# EAGLE board SparkX_EZ_Power_AAA-Panel (EAGLE 9.6.2), part 1 of 13
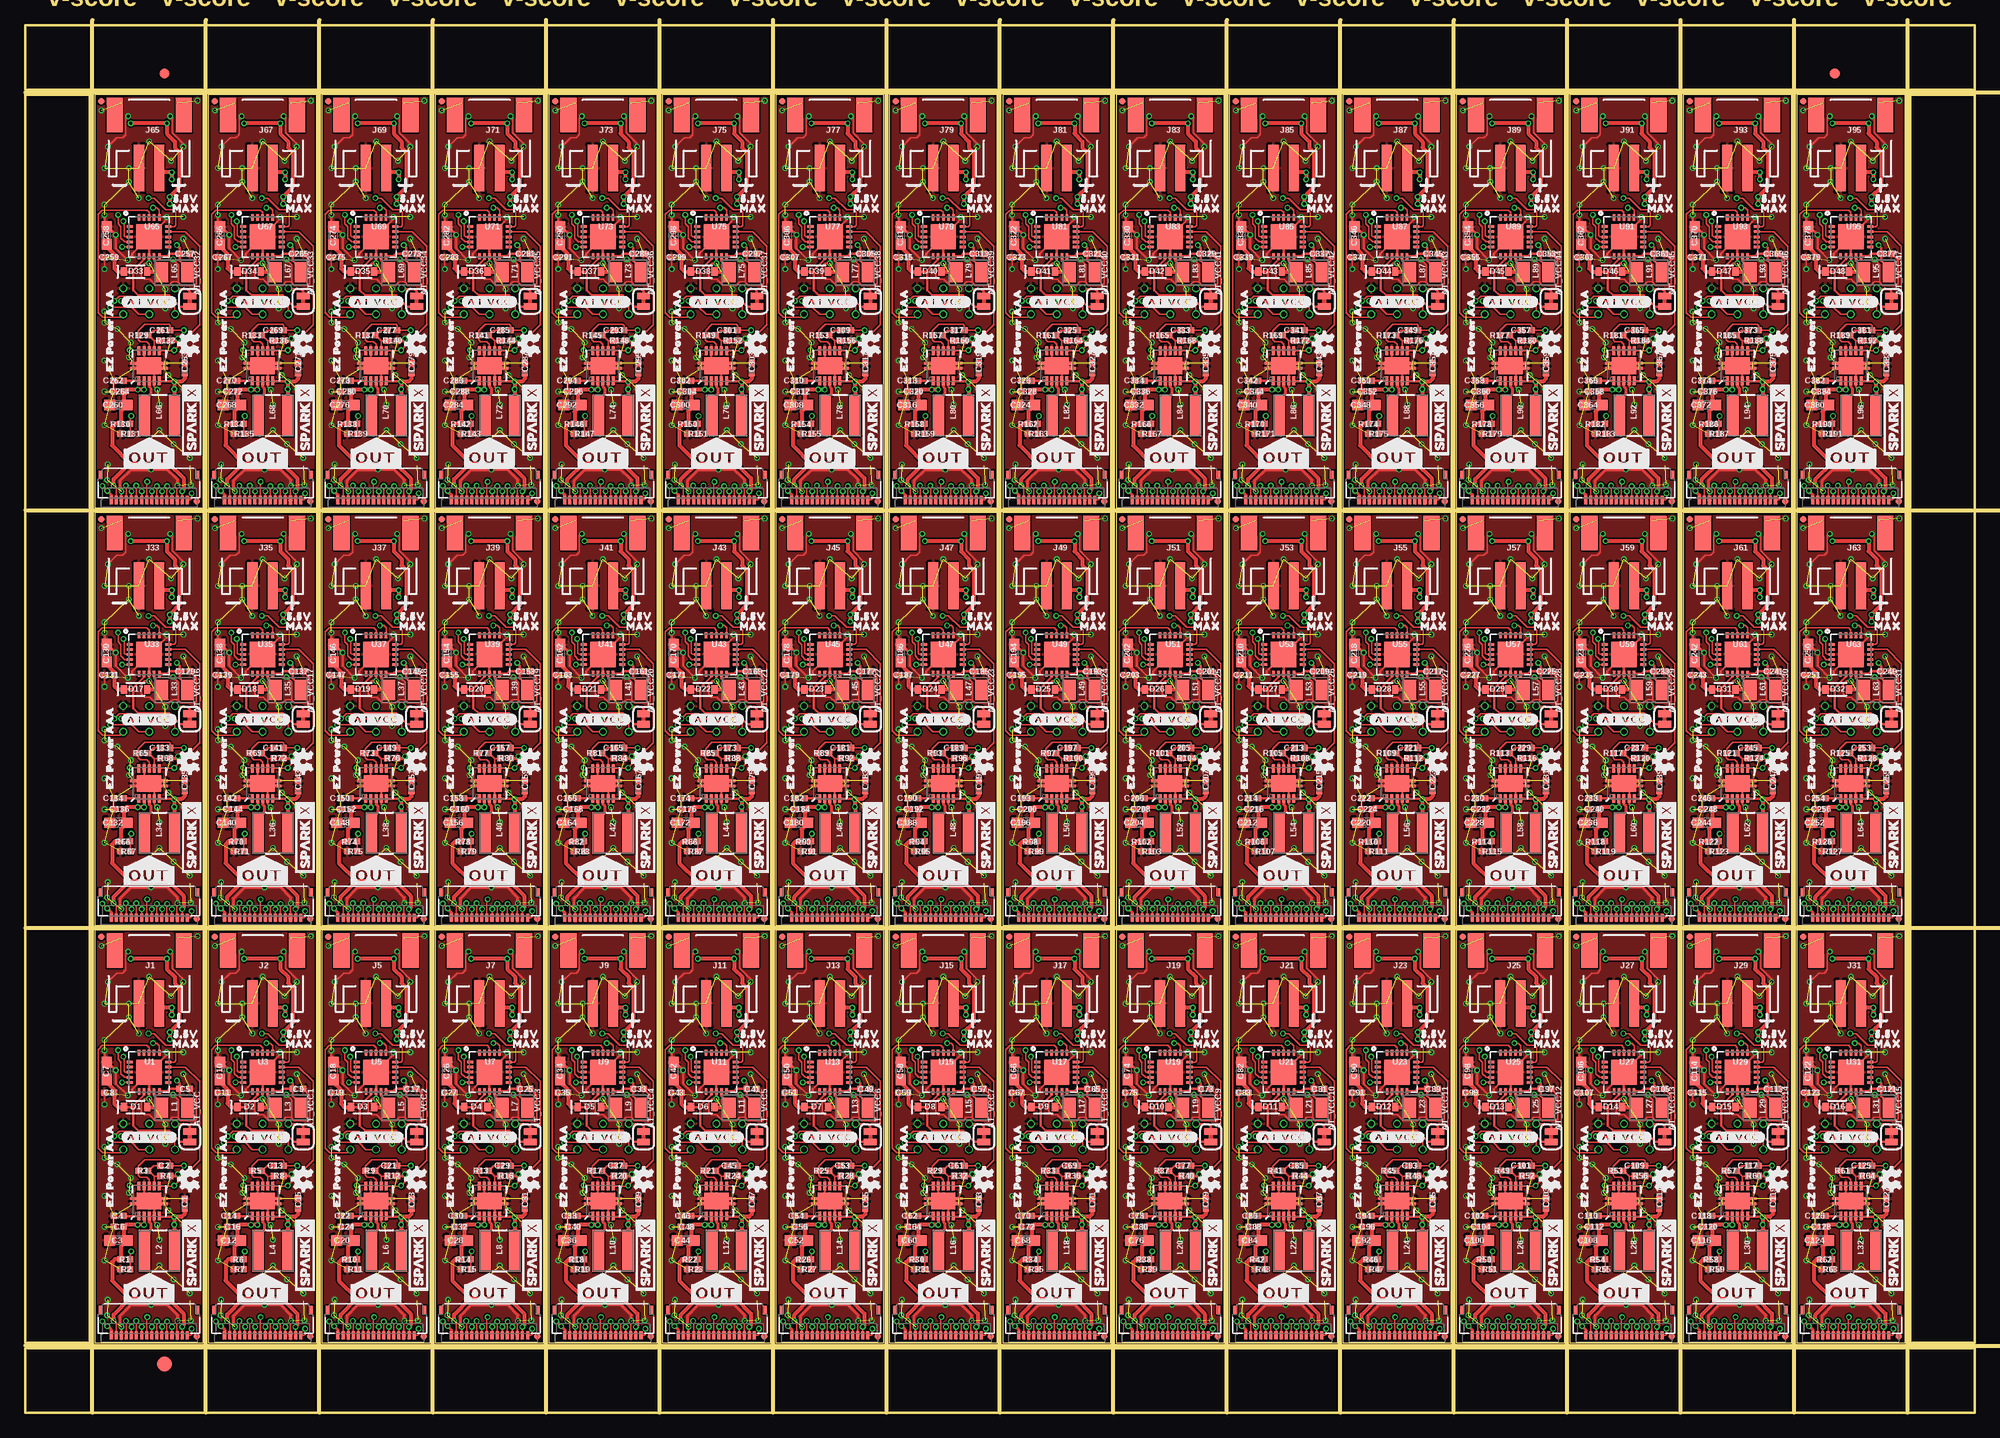
[diagram p0: board, top side]
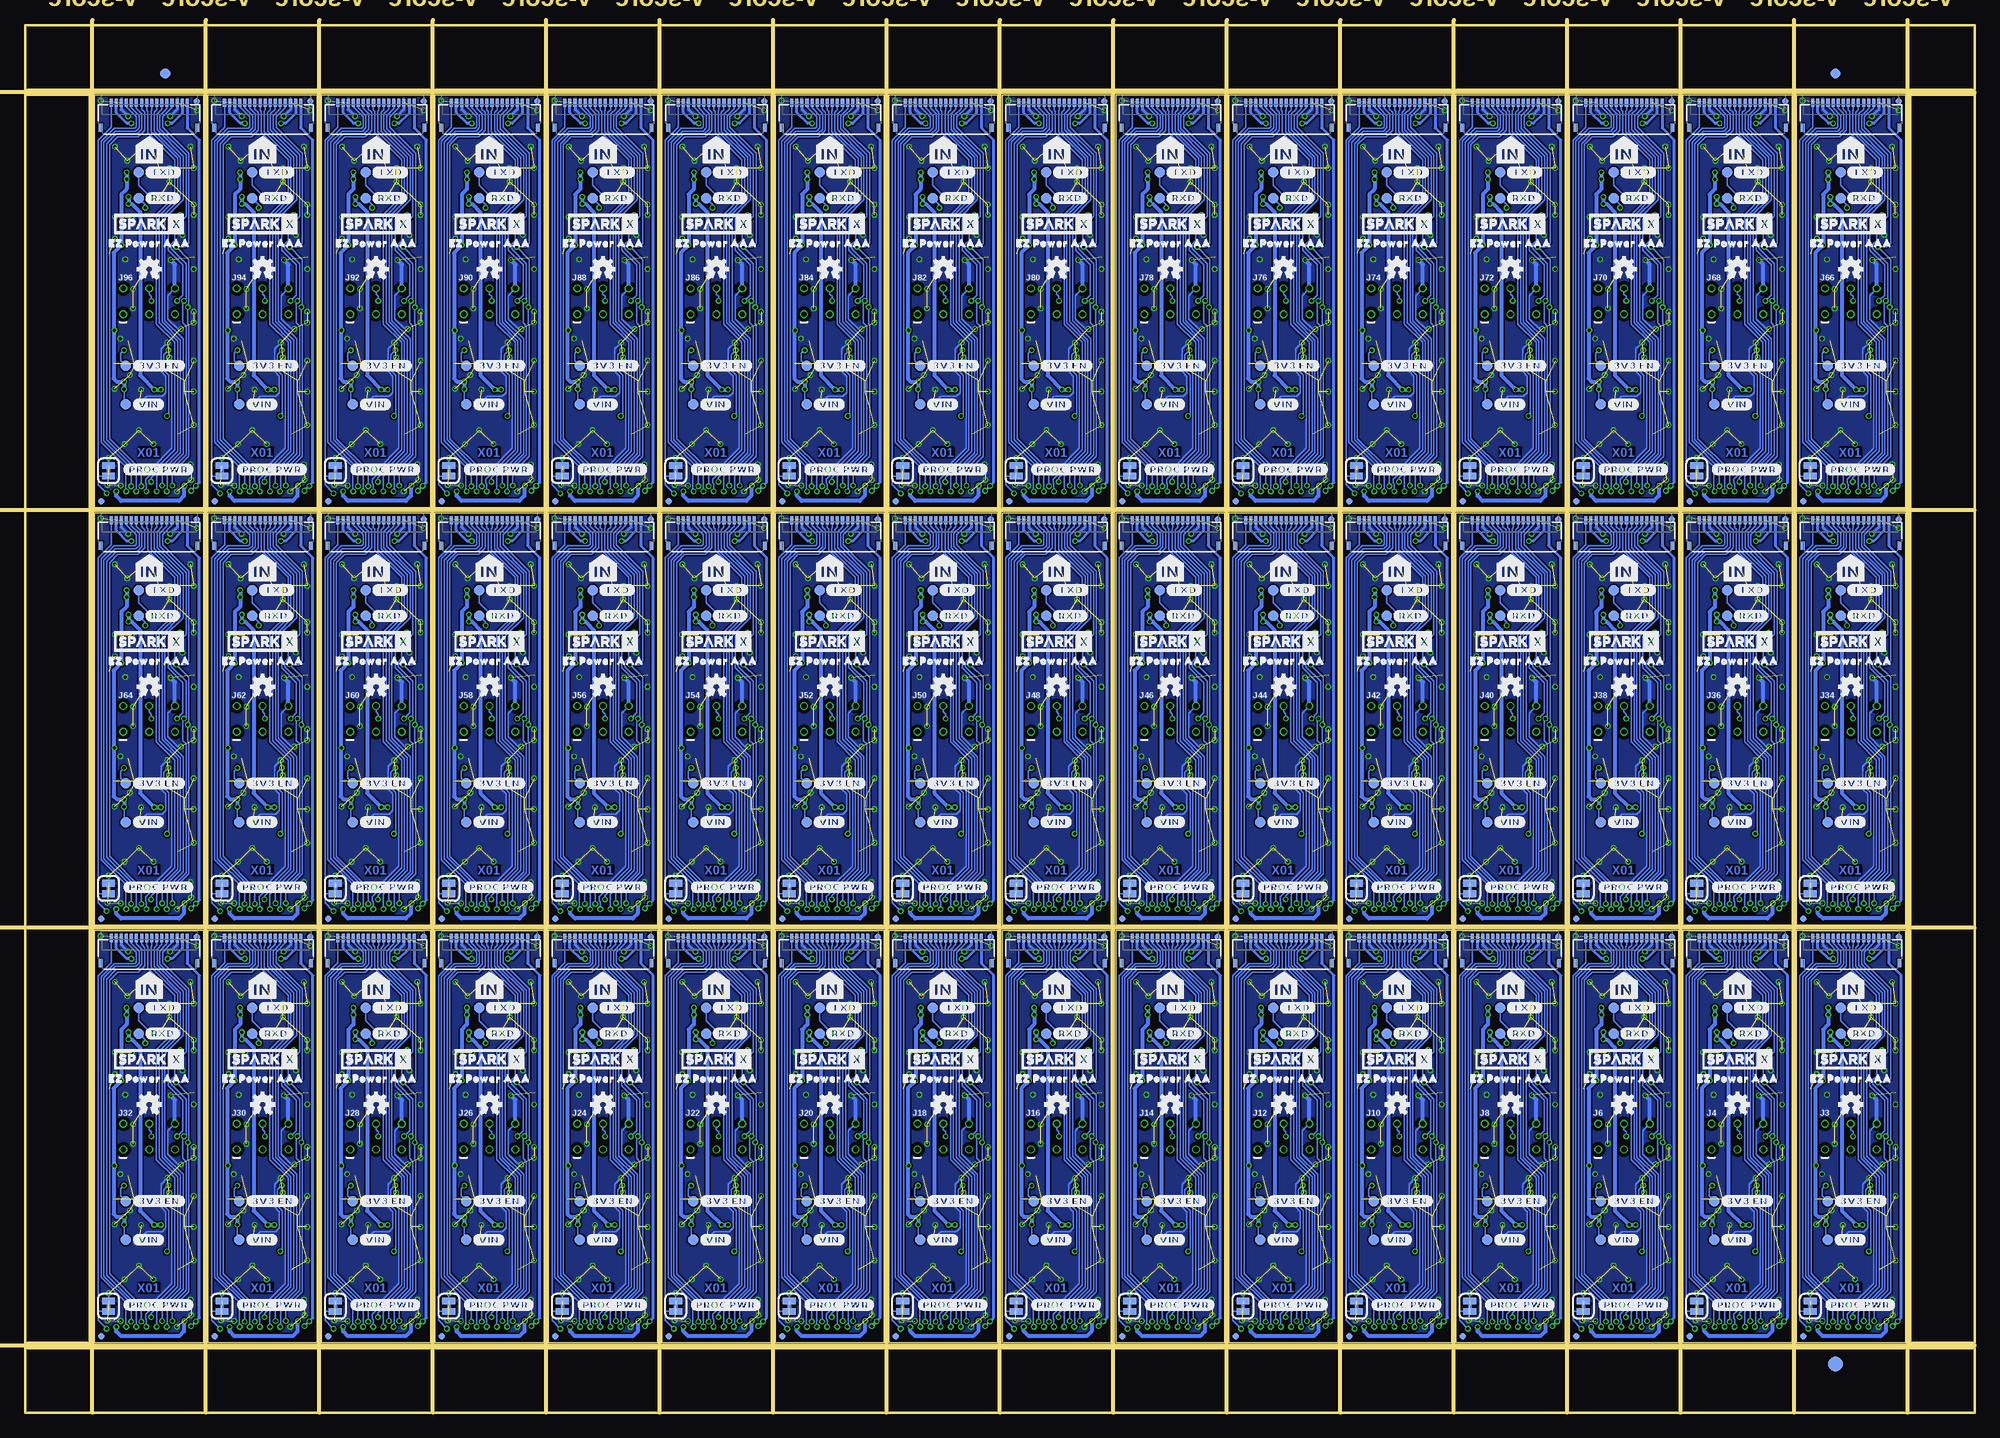
[diagram p1: board, bottom side, seen from below]

Size 192.02 x 136.65 mm. Coordinates in mm from the lower left corner, seen from the top.
Outline: 208 segments
Copper layers (1*16): Top 0.035mm / dielectric 1.5mm / Bottom 0.035mm
Design rules "SparkX_EZ_Power_AAA": minimum track width 5mil, minimum drill 0.3mm, track to track 5mil, track to pad 5mil, pad to pad 5mil, via to via 5mil, smd to smd 5mil, copper to edge 7mil, drill to drill 7mil, minimum pad ring 5mil, minimum via ring 5mil, stop-mask expansion 2.5mil, vias tented up to drill 25mil, thermal gap 10mil
bRestrict: area 9.1,27.9 to 10.2,29; area 11.7,27.9 to 12.7,29; area 14.2,27.9 to 15.2,29; area 14.2,25.4 to 15.2,26.4; area 11.7,25.4 to 12.7,26.4; area 9.1,25.4 to 10.2,26.4; area 20.3,27.9 to 21.3,29; area 22.9,27.9 to 23.9,29; area 25.4,27.9 to 26.4,29; area 25.4,25.4 to 26.4,26.4; area 22.9,25.4 to 23.9,26.4; area 20.3,25.4 to 21.3,26.4; 276 more areas
Milling: 21 lines

## Footprints (pad centres in the part's own frame; a part is rotated, then mirrored left to right if it is on the bottom)
PAD.03X.04 = smd 1.016 x 1.016: 1 0,0
SMT-JUMPER_2_NC_TRACE_SILK = smd 0.66 x 1.27: 1 -0.521,0; 2 0.521,0
0402-TIGHT = smd 0.6 x 0.6: 1 -0.5,0; 2 0.5,0
0603 = smd 1.1 x 1: 1 -0.85,0; 2 0.85,0
SOD-323 = smd 0.63 x 0.83: A 1.15,0; C -1.15,0
FIDUCIAL-1X2 = smd 1 x 1: 1 0,0
FIDUCIAL-1.5X3 = smd 1.5 x 1.5: 1 0,0
FIDUCIAL-MICRO = smd 0.635 x 0.635: 1 0,0
FPC_16_DOUBLESIDED_BACKFLIP = smd 0.3 x 0.8: 1 -3.75,1.35; 2 -3.25,1.35; 3 -2.75,1.35; 4 -2.25,1.35; 5 -1.75,1.35; 6 -1.25,1.35; 7 -0.75,1.35; 8 -0.25,1.35; 9 0.25,1.35; 10 0.75,1.35; 11 1.25,1.35; 12 1.75,1.35; 13 2.25,1.35; 14 2.75,1.35; 15 3.25,1.35; 16 3.75,1.35 | smd 0.4 x 0.8: MP1 -4.75,-1.15; MP2 4.75,-1.15
JST-2-SMD = smd 1 x 4.6: 1 -1,-3.7; 2 1,-3.7 | smd 1.6 x 3.4: NC1 -3.4,1.5; NC2 3.4,1.5
2X3_TEST_POINTS = drill 0.508: 1 -2.54,-1.27; 2 -2.54,1.27; 3 0,-1.27; 4 0,1.27; 5 2.54,-1.27; 6 2.54,1.27
INDUCTOR_LQH32 = smd 2 x 1.25: P$1 -0.07,1.205; P$2 -0.07,-1.295
INDUCTOR_4X4MM = smd 4.089 x 1.143: P$1 0,1.473; P$2 0,-1.473
QFN20_20M1 = smd 0.6 x 0.25: 1 -1.9,1; 2 -1.9,0.5; 3 -1.9,0; 4 -1.9,-0.5; 5 -1.9,-1; 11 1.9,-1; 12 1.9,-0.5; 13 1.9,0; 14 1.9,0.5; 15 1.9,1 | smd 0.25 x 0.6: 6 -1,-1.9; 7 -0.5,-1.9; 8 0,-1.9; 9 0.5,-1.9; 10 1,-1.9; 16 1,1.9; 17 0.5,1.9; 18 0,1.9; 19 -0.5,1.9; 20 -1,1.9 | smd 2.5 x 2.5: PAD 0,0
QFN-10_PAD = smd 0.297 x 0.85: 1 -1,-1.475; 2 -0.5,-1.475; 3 0,-1.475; 4 0.5,-1.475; 5 1,-1.475; 6 1,1.475; 7 0.5,1.475; 8 0,1.475; 9 -0.5,1.475; 10 -1,1.475 | smd 0.7 x 0.28: 11 -1.5,0.25; 12 -1.5,-0.25; 13 1.5,0.25; 14 1.5,-0.25 | smd 2.4 x 1.65: 15 0,0

## Placement (x,y rotation side)
3V3_EN  TEST-POINT3X4  [PAD.03X.04]  14.48,20.83 0 bottom
3V3_EN1  TEST-POINT3X4  [PAD.03X.04]  25.65,20.83 0 bottom
3V3_EN2  TEST-POINT3X4  [PAD.03X.04]  36.83,20.83 0 bottom
3V3_EN3  TEST-POINT3X4  [PAD.03X.04]  48.01,20.83 0 bottom
3V3_EN4  TEST-POINT3X4  [PAD.03X.04]  59.18,20.83 0 bottom
3V3_EN5  TEST-POINT3X4  [PAD.03X.04]  70.36,20.83 0 bottom
3V3_EN6  TEST-POINT3X4  [PAD.03X.04]  81.53,20.83 0 bottom
3V3_EN7  TEST-POINT3X4  [PAD.03X.04]  92.71,20.83 0 bottom
3V3_EN8  TEST-POINT3X4  [PAD.03X.04]  103.89,20.83 0 bottom
3V3_EN9  TEST-POINT3X4  [PAD.03X.04]  115.06,20.83 0 bottom
3V3_EN10  TEST-POINT3X4  [PAD.03X.04]  126.24,20.83 0 bottom
3V3_EN11  TEST-POINT3X4  [PAD.03X.04]  137.41,20.83 0 bottom
3V3_EN12  TEST-POINT3X4  [PAD.03X.04]  148.59,20.83 0 bottom
3V3_EN13  TEST-POINT3X4  [PAD.03X.04]  159.77,20.83 0 bottom
3V3_EN14  TEST-POINT3X4  [PAD.03X.04]  170.94,20.83 0 bottom
3V3_EN15  TEST-POINT3X4  [PAD.03X.04]  182.12,20.83 0 bottom
3V3_EN16  TEST-POINT3X4  [PAD.03X.04]  14.48,61.98 0 bottom
3V3_EN17  TEST-POINT3X4  [PAD.03X.04]  25.65,61.98 0 bottom
3V3_EN18  TEST-POINT3X4  [PAD.03X.04]  36.83,61.98 0 bottom
3V3_EN19  TEST-POINT3X4  [PAD.03X.04]  48.01,61.98 0 bottom
3V3_EN20  TEST-POINT3X4  [PAD.03X.04]  59.18,61.98 0 bottom
3V3_EN21  TEST-POINT3X4  [PAD.03X.04]  70.36,61.98 0 bottom
3V3_EN22  TEST-POINT3X4  [PAD.03X.04]  81.53,61.98 0 bottom
3V3_EN23  TEST-POINT3X4  [PAD.03X.04]  92.71,61.98 0 bottom
3V3_EN24  TEST-POINT3X4  [PAD.03X.04]  103.89,61.98 0 bottom
3V3_EN25  TEST-POINT3X4  [PAD.03X.04]  115.06,61.98 0 bottom
3V3_EN26  TEST-POINT3X4  [PAD.03X.04]  126.24,61.98 0 bottom
3V3_EN27  TEST-POINT3X4  [PAD.03X.04]  137.41,61.98 0 bottom
3V3_EN28  TEST-POINT3X4  [PAD.03X.04]  148.59,61.98 0 bottom
3V3_EN29  TEST-POINT3X4  [PAD.03X.04]  159.77,61.98 0 bottom
3V3_EN30  TEST-POINT3X4  [PAD.03X.04]  170.94,61.98 0 bottom
3V3_EN31  TEST-POINT3X4  [PAD.03X.04]  182.12,61.98 0 bottom
3V3_EN32  TEST-POINT3X4  [PAD.03X.04]  14.48,103.12 0 bottom
3V3_EN33  TEST-POINT3X4  [PAD.03X.04]  25.65,103.12 0 bottom
3V3_EN34  TEST-POINT3X4  [PAD.03X.04]  36.83,103.12 0 bottom
3V3_EN35  TEST-POINT3X4  [PAD.03X.04]  48.01,103.12 0 bottom
3V3_EN36  TEST-POINT3X4  [PAD.03X.04]  59.18,103.12 0 bottom
3V3_EN37  TEST-POINT3X4  [PAD.03X.04]  70.36,103.12 0 bottom
3V3_EN38  TEST-POINT3X4  [PAD.03X.04]  81.53,103.12 0 bottom
3V3_EN39  TEST-POINT3X4  [PAD.03X.04]  92.71,103.12 0 bottom
3V3_EN40  TEST-POINT3X4  [PAD.03X.04]  103.89,103.12 0 bottom
3V3_EN41  TEST-POINT3X4  [PAD.03X.04]  115.06,103.12 0 bottom
3V3_EN42  TEST-POINT3X4  [PAD.03X.04]  126.24,103.12 0 bottom
3V3_EN43  TEST-POINT3X4  [PAD.03X.04]  137.41,103.12 0 bottom
3V3_EN44  TEST-POINT3X4  [PAD.03X.04]  148.59,103.12 0 bottom
3V3_EN45  TEST-POINT3X4  [PAD.03X.04]  159.77,103.12 0 bottom
3V3_EN46  TEST-POINT3X4  [PAD.03X.04]  170.94,103.12 0 bottom
3V3_EN47  TEST-POINT3X4  [PAD.03X.04]  182.12,103.12 0 bottom
AT_VCC  JUMPER-SMT_2_NC_TRACE_SILK  [SMT-JUMPER_2_NC_TRACE_SILK]  16.19,27.18 270 top
AT_VCC1  JUMPER-SMT_2_NC_TRACE_SILK  [SMT-JUMPER_2_NC_TRACE_SILK]  27.37,27.18 270 top
AT_VCC2  JUMPER-SMT_2_NC_TRACE_SILK  [SMT-JUMPER_2_NC_TRACE_SILK]  38.54,27.18 270 top
AT_VCC3  JUMPER-SMT_2_NC_TRACE_SILK  [SMT-JUMPER_2_NC_TRACE_SILK]  49.72,27.18 270 top
AT_VCC4  JUMPER-SMT_2_NC_TRACE_SILK  [SMT-JUMPER_2_NC_TRACE_SILK]  60.9,27.18 270 top
AT_VCC5  JUMPER-SMT_2_NC_TRACE_SILK  [SMT-JUMPER_2_NC_TRACE_SILK]  72.07,27.18 270 top
AT_VCC6  JUMPER-SMT_2_NC_TRACE_SILK  [SMT-JUMPER_2_NC_TRACE_SILK]  83.25,27.18 270 top
AT_VCC7  JUMPER-SMT_2_NC_TRACE_SILK  [SMT-JUMPER_2_NC_TRACE_SILK]  94.42,27.18 270 top
AT_VCC8  JUMPER-SMT_2_NC_TRACE_SILK  [SMT-JUMPER_2_NC_TRACE_SILK]  105.6,27.18 270 top
AT_VCC9  JUMPER-SMT_2_NC_TRACE_SILK  [SMT-JUMPER_2_NC_TRACE_SILK]  116.78,27.18 270 top
AT_VCC10  JUMPER-SMT_2_NC_TRACE_SILK  [SMT-JUMPER_2_NC_TRACE_SILK]  127.95,27.18 270 top
AT_VCC11  JUMPER-SMT_2_NC_TRACE_SILK  [SMT-JUMPER_2_NC_TRACE_SILK]  139.13,27.18 270 top
AT_VCC12  JUMPER-SMT_2_NC_TRACE_SILK  [SMT-JUMPER_2_NC_TRACE_SILK]  150.3,27.18 270 top
AT_VCC13  JUMPER-SMT_2_NC_TRACE_SILK  [SMT-JUMPER_2_NC_TRACE_SILK]  161.48,27.18 270 top
AT_VCC14  JUMPER-SMT_2_NC_TRACE_SILK  [SMT-JUMPER_2_NC_TRACE_SILK]  172.66,27.18 270 top
AT_VCC15  JUMPER-SMT_2_NC_TRACE_SILK  [SMT-JUMPER_2_NC_TRACE_SILK]  183.83,27.18 270 top
AT_VCC16  JUMPER-SMT_2_NC_TRACE_SILK  [SMT-JUMPER_2_NC_TRACE_SILK]  16.19,68.33 270 top
AT_VCC17  JUMPER-SMT_2_NC_TRACE_SILK  [SMT-JUMPER_2_NC_TRACE_SILK]  27.37,68.33 270 top
AT_VCC18  JUMPER-SMT_2_NC_TRACE_SILK  [SMT-JUMPER_2_NC_TRACE_SILK]  38.54,68.33 270 top
AT_VCC19  JUMPER-SMT_2_NC_TRACE_SILK  [SMT-JUMPER_2_NC_TRACE_SILK]  49.72,68.33 270 top
AT_VCC20  JUMPER-SMT_2_NC_TRACE_SILK  [SMT-JUMPER_2_NC_TRACE_SILK]  60.9,68.33 270 top
AT_VCC21  JUMPER-SMT_2_NC_TRACE_SILK  [SMT-JUMPER_2_NC_TRACE_SILK]  72.07,68.33 270 top
AT_VCC22  JUMPER-SMT_2_NC_TRACE_SILK  [SMT-JUMPER_2_NC_TRACE_SILK]  83.25,68.33 270 top
AT_VCC23  JUMPER-SMT_2_NC_TRACE_SILK  [SMT-JUMPER_2_NC_TRACE_SILK]  94.42,68.33 270 top
AT_VCC24  JUMPER-SMT_2_NC_TRACE_SILK  [SMT-JUMPER_2_NC_TRACE_SILK]  105.6,68.33 270 top
AT_VCC25  JUMPER-SMT_2_NC_TRACE_SILK  [SMT-JUMPER_2_NC_TRACE_SILK]  116.78,68.33 270 top
AT_VCC26  JUMPER-SMT_2_NC_TRACE_SILK  [SMT-JUMPER_2_NC_TRACE_SILK]  127.95,68.33 270 top
AT_VCC27  JUMPER-SMT_2_NC_TRACE_SILK  [SMT-JUMPER_2_NC_TRACE_SILK]  139.13,68.33 270 top
AT_VCC28  JUMPER-SMT_2_NC_TRACE_SILK  [SMT-JUMPER_2_NC_TRACE_SILK]  150.3,68.33 270 top
AT_VCC29  JUMPER-SMT_2_NC_TRACE_SILK  [SMT-JUMPER_2_NC_TRACE_SILK]  161.48,68.33 270 top
AT_VCC30  JUMPER-SMT_2_NC_TRACE_SILK  [SMT-JUMPER_2_NC_TRACE_SILK]  172.66,68.33 270 top
AT_VCC31  JUMPER-SMT_2_NC_TRACE_SILK  [SMT-JUMPER_2_NC_TRACE_SILK]  183.83,68.33 270 top
AT_VCC32  JUMPER-SMT_2_NC_TRACE_SILK  [SMT-JUMPER_2_NC_TRACE_SILK]  16.19,109.47 270 top
AT_VCC33  JUMPER-SMT_2_NC_TRACE_SILK  [SMT-JUMPER_2_NC_TRACE_SILK]  27.37,109.47 270 top
AT_VCC34  JUMPER-SMT_2_NC_TRACE_SILK  [SMT-JUMPER_2_NC_TRACE_SILK]  38.54,109.47 270 top
AT_VCC35  JUMPER-SMT_2_NC_TRACE_SILK  [SMT-JUMPER_2_NC_TRACE_SILK]  49.72,109.47 270 top
AT_VCC36  JUMPER-SMT_2_NC_TRACE_SILK  [SMT-JUMPER_2_NC_TRACE_SILK]  60.9,109.47 270 top
AT_VCC37  JUMPER-SMT_2_NC_TRACE_SILK  [SMT-JUMPER_2_NC_TRACE_SILK]  72.07,109.47 270 top
AT_VCC38  JUMPER-SMT_2_NC_TRACE_SILK  [SMT-JUMPER_2_NC_TRACE_SILK]  83.25,109.47 270 top
AT_VCC39  JUMPER-SMT_2_NC_TRACE_SILK  [SMT-JUMPER_2_NC_TRACE_SILK]  94.42,109.47 270 top
AT_VCC40  JUMPER-SMT_2_NC_TRACE_SILK  [SMT-JUMPER_2_NC_TRACE_SILK]  105.6,109.47 270 top
AT_VCC41  JUMPER-SMT_2_NC_TRACE_SILK  [SMT-JUMPER_2_NC_TRACE_SILK]  116.78,109.47 270 top
AT_VCC42  JUMPER-SMT_2_NC_TRACE_SILK  [SMT-JUMPER_2_NC_TRACE_SILK]  127.95,109.47 270 top
AT_VCC43  JUMPER-SMT_2_NC_TRACE_SILK  [SMT-JUMPER_2_NC_TRACE_SILK]  139.13,109.47 270 top
AT_VCC44  JUMPER-SMT_2_NC_TRACE_SILK  [SMT-JUMPER_2_NC_TRACE_SILK]  150.3,109.47 270 top
AT_VCC45  JUMPER-SMT_2_NC_TRACE_SILK  [SMT-JUMPER_2_NC_TRACE_SILK]  161.48,109.47 270 top
AT_VCC46  JUMPER-SMT_2_NC_TRACE_SILK  [SMT-JUMPER_2_NC_TRACE_SILK]  172.66,109.47 270 top
AT_VCC47  JUMPER-SMT_2_NC_TRACE_SILK  [SMT-JUMPER_2_NC_TRACE_SILK]  183.83,109.47 270 top
C1  10uF  [0402-TIGHT]  15.68,20.57 90 top
C2  0.1uF  [0402-TIGHT]  13.78,24.32 180 top
C3  22uF  [0603]  9.18,16.95 180 top
C4  0.1uF  [0402-TIGHT]  9.21,19.37 180 top
C5  4.7uF  [0402-TIGHT]  15.68,31.88 0 top
C6  0.1uF  [0402-TIGHT]  9.21,18.29 180 top
C7  22uF  [0603]  8,33.66 90 top
C8  0.1uF  [0402-TIGHT]  8.25,31.5 180 top
C9  4.7uF  [0402-TIGHT]  26.86,31.88 0 top
C10  22uF  [0603]  19.18,33.66 90 top
C11  0.1uF  [0402-TIGHT]  19.43,31.5 180 top
C12  22uF  [0603]  20.35,16.95 180 top
C13  0.1uF  [0402-TIGHT]  24.96,24.32 180 top
C14  0.1uF  [0402-TIGHT]  20.38,19.37 180 top
C15  10uF  [0402-TIGHT]  26.86,20.57 90 top
C16  0.1uF  [0402-TIGHT]  20.38,18.29 180 top
C17  4.7uF  [0402-TIGHT]  38.04,31.88 0 top
C18  22uF  [0603]  30.35,33.66 90 top
C19  0.1uF  [0402-TIGHT]  30.61,31.5 180 top
C20  22uF  [0603]  31.53,16.95 180 top
C21  0.1uF  [0402-TIGHT]  36.13,24.32 180 top
C22  0.1uF  [0402-TIGHT]  31.56,19.37 180 top
C23  10uF  [0402-TIGHT]  38.04,20.57 90 top
C24  0.1uF  [0402-TIGHT]  31.56,18.29 180 top
C25  4.7uF  [0402-TIGHT]  49.21,31.88 0 top
C26  22uF  [0603]  41.53,33.66 90 top
C27  0.1uF  [0402-TIGHT]  41.78,31.5 180 top
C28  22uF  [0603]  42.7,16.95 180 top
C29  0.1uF  [0402-TIGHT]  47.31,24.32 180 top
C30  0.1uF  [0402-TIGHT]  42.74,19.37 180 top
C31  10uF  [0402-TIGHT]  49.21,20.57 90 top
C32  0.1uF  [0402-TIGHT]  42.74,18.29 180 top
C33  4.7uF  [0402-TIGHT]  60.39,31.88 0 top
C34  22uF  [0603]  52.7,33.66 90 top
C35  0.1uF  [0402-TIGHT]  52.96,31.5 180 top
C36  22uF  [0603]  53.88,16.95 180 top
C37  0.1uF  [0402-TIGHT]  58.48,24.32 180 top
C38  0.1uF  [0402-TIGHT]  53.91,19.37 180 top
C39  10uF  [0402-TIGHT]  60.39,20.57 90 top
C40  0.1uF  [0402-TIGHT]  53.91,18.29 180 top
C41  4.7uF  [0402-TIGHT]  71.56,31.88 0 top
C42  22uF  [0603]  63.88,33.66 90 top
C43  0.1uF  [0402-TIGHT]  64.14,31.5 180 top
C44  22uF  [0603]  65.06,16.95 180 top
C45  0.1uF  [0402-TIGHT]  69.66,24.32 180 top
C46  0.1uF  [0402-TIGHT]  65.09,19.37 180 top
C47  10uF  [0402-TIGHT]  71.56,20.57 90 top
C48  0.1uF  [0402-TIGHT]  65.09,18.29 180 top
C49  4.7uF  [0402-TIGHT]  82.74,31.88 0 top
C50  22uF  [0603]  75.06,33.66 90 top
C51  0.1uF  [0402-TIGHT]  75.31,31.5 180 top
C52  22uF  [0603]  76.23,16.95 180 top
C53  0.1uF  [0402-TIGHT]  80.84,24.32 180 top
C54  0.1uF  [0402-TIGHT]  76.26,19.37 180 top
C55  10uF  [0402-TIGHT]  82.74,20.57 90 top
C56  0.1uF  [0402-TIGHT]  76.26,18.29 180 top
C57  4.7uF  [0402-TIGHT]  93.92,31.88 0 top
C58  22uF  [0603]  86.23,33.66 90 top
C59  0.1uF  [0402-TIGHT]  86.49,31.5 180 top
C60  22uF  [0603]  87.41,16.95 180 top
C61  0.1uF  [0402-TIGHT]  92.01,24.32 180 top
C62  0.1uF  [0402-TIGHT]  87.44,19.37 180 top
C63  10uF  [0402-TIGHT]  93.92,20.57 90 top
C64  0.1uF  [0402-TIGHT]  87.44,18.29 180 top
C65  4.7uF  [0402-TIGHT]  105.09,31.88 0 top
C66  22uF  [0603]  97.41,33.66 90 top
C67  0.1uF  [0402-TIGHT]  97.66,31.5 180 top
C68  22uF  [0603]  98.58,16.95 180 top
C69  0.1uF  [0402-TIGHT]  103.19,24.32 180 top
C70  0.1uF  [0402-TIGHT]  98.62,19.37 180 top
C71  10uF  [0402-TIGHT]  105.09,20.57 90 top
C72  0.1uF  [0402-TIGHT]  98.62,18.29 180 top
C73  4.7uF  [0402-TIGHT]  116.27,31.88 0 top
C74  22uF  [0603]  108.59,33.66 90 top
C75  0.1uF  [0402-TIGHT]  108.84,31.5 180 top
C76  22uF  [0603]  109.76,16.95 180 top
C77  0.1uF  [0402-TIGHT]  114.36,24.32 180 top
C78  0.1uF  [0402-TIGHT]  109.79,19.37 180 top
C79  10uF  [0402-TIGHT]  116.27,20.57 90 top
C80  0.1uF  [0402-TIGHT]  109.79,18.29 180 top
C81  4.7uF  [0402-TIGHT]  127.44,31.88 0 top
C82  22uF  [0603]  119.76,33.66 90 top
C83  0.1uF  [0402-TIGHT]  120.02,31.5 180 top
C84  22uF  [0603]  120.94,16.95 180 top
C85  0.1uF  [0402-TIGHT]  125.54,24.32 180 top
C86  0.1uF  [0402-TIGHT]  120.97,19.37 180 top
C87  10uF  [0402-TIGHT]  127.44,20.57 90 top
C88  0.1uF  [0402-TIGHT]  120.97,18.29 180 top
C89  4.7uF  [0402-TIGHT]  138.62,31.88 0 top
C90  22uF  [0603]  130.94,33.66 90 top
C91  0.1uF  [0402-TIGHT]  131.19,31.5 180 top
C92  22uF  [0603]  132.11,16.95 180 top
C93  0.1uF  [0402-TIGHT]  136.72,24.32 180 top
C94  0.1uF  [0402-TIGHT]  132.14,19.37 180 top
C95  10uF  [0402-TIGHT]  138.62,20.57 90 top
C96  0.1uF  [0402-TIGHT]  132.14,18.29 180 top
C97  4.7uF  [0402-TIGHT]  149.8,31.88 0 top
C98  22uF  [0603]  142.11,33.66 90 top
C99  0.1uF  [0402-TIGHT]  142.37,31.5 180 top
C100  22uF  [0603]  143.29,16.95 180 top
C101  0.1uF  [0402-TIGHT]  147.89,24.32 180 top
C102  0.1uF  [0402-TIGHT]  143.32,19.37 180 top
C103  10uF  [0402-TIGHT]  149.8,20.57 90 top
C104  0.1uF  [0402-TIGHT]  143.32,18.29 180 top
C105  4.7uF  [0402-TIGHT]  160.97,31.88 0 top
C106  22uF  [0603]  153.29,33.66 90 top
C107  0.1uF  [0402-TIGHT]  153.54,31.5 180 top
C108  22uF  [0603]  154.46,16.95 180 top
C109  0.1uF  [0402-TIGHT]  159.07,24.32 180 top
C110  0.1uF  [0402-TIGHT]  154.5,19.37 180 top
C111  10uF  [0402-TIGHT]  160.97,20.57 90 top
C112  0.1uF  [0402-TIGHT]  154.5,18.29 180 top
C113  4.7uF  [0402-TIGHT]  172.15,31.88 0 top
C114  22uF  [0603]  164.47,33.66 90 top
C115  0.1uF  [0402-TIGHT]  164.72,31.5 180 top
C116  22uF  [0603]  165.64,16.95 180 top
C117  0.1uF  [0402-TIGHT]  170.24,24.32 180 top
C118  0.1uF  [0402-TIGHT]  165.67,19.37 180 top
C119  10uF  [0402-TIGHT]  172.15,20.57 90 top
C120  0.1uF  [0402-TIGHT]  165.67,18.29 180 top
C121  4.7uF  [0402-TIGHT]  183.32,31.88 0 top
C122  22uF  [0603]  175.64,33.66 90 top
C123  0.1uF  [0402-TIGHT]  175.9,31.5 180 top
C124  22uF  [0603]  176.82,16.95 180 top
C125  0.1uF  [0402-TIGHT]  181.42,24.32 180 top
C126  0.1uF  [0402-TIGHT]  176.85,19.37 180 top
C127  10uF  [0402-TIGHT]  183.32,20.57 90 top
C128  0.1uF  [0402-TIGHT]  176.85,18.29 180 top
C129  4.7uF  [0402-TIGHT]  15.68,73.03 0 top
C130  22uF  [0603]  8,74.8 90 top
C131  0.1uF  [0402-TIGHT]  8.25,72.64 180 top
C132  22uF  [0603]  9.18,58.1 180 top
C133  0.1uF  [0402-TIGHT]  13.78,65.47 180 top
C134  0.1uF  [0402-TIGHT]  9.21,60.52 180 top
C135  10uF  [0402-TIGHT]  15.68,61.72 90 top
C136  0.1uF  [0402-TIGHT]  9.21,59.44 180 top
C137  4.7uF  [0402-TIGHT]  26.86,73.03 0 top
C138  22uF  [0603]  19.18,74.8 90 top
C139  0.1uF  [0402-TIGHT]  19.43,72.64 180 top
C140  22uF  [0603]  20.35,58.1 180 top
C141  0.1uF  [0402-TIGHT]  24.96,65.47 180 top
C142  0.1uF  [0402-TIGHT]  20.38,60.52 180 top
C143  10uF  [0402-TIGHT]  26.86,61.72 90 top
C144  0.1uF  [0402-TIGHT]  20.38,59.44 180 top
C145  4.7uF  [0402-TIGHT]  38.04,73.03 0 top
C146  22uF  [0603]  30.35,74.8 90 top
C147  0.1uF  [0402-TIGHT]  30.61,72.64 180 top
C148  22uF  [0603]  31.53,58.1 180 top
C149  0.1uF  [0402-TIGHT]  36.13,65.47 180 top
C150  0.1uF  [0402-TIGHT]  31.56,60.52 180 top
C151  10uF  [0402-TIGHT]  38.04,61.72 90 top
C152  0.1uF  [0402-TIGHT]  31.56,59.44 180 top
C153  4.7uF  [0402-TIGHT]  49.21,73.03 0 top
C154  22uF  [0603]  41.53,74.8 90 top
C155  0.1uF  [0402-TIGHT]  41.78,72.64 180 top
C156  22uF  [0603]  42.7,58.1 180 top
C157  0.1uF  [0402-TIGHT]  47.31,65.47 180 top
C158  0.1uF  [0402-TIGHT]  42.74,60.52 180 top
C159  10uF  [0402-TIGHT]  49.21,61.72 90 top
C160  0.1uF  [0402-TIGHT]  42.74,59.44 180 top
C161  4.7uF  [0402-TIGHT]  60.39,73.03 0 top
C162  22uF  [0603]  52.7,74.8 90 top
C163  0.1uF  [0402-TIGHT]  52.96,72.64 180 top
C164  22uF  [0603]  53.88,58.1 180 top
C165  0.1uF  [0402-TIGHT]  58.48,65.47 180 top
C166  0.1uF  [0402-TIGHT]  53.91,60.52 180 top
C167  10uF  [0402-TIGHT]  60.39,61.72 90 top
C168  0.1uF  [0402-TIGHT]  53.91,59.44 180 top
C169  4.7uF  [0402-TIGHT]  71.56,73.03 0 top
C170  22uF  [0603]  63.88,74.8 90 top
C171  0.1uF  [0402-TIGHT]  64.14,72.64 180 top
C172  22uF  [0603]  65.06,58.1 180 top
C173  0.1uF  [0402-TIGHT]  69.66,65.47 180 top
C174  0.1uF  [0402-TIGHT]  65.09,60.52 180 top
C175  10uF  [0402-TIGHT]  71.56,61.72 90 top
C176  0.1uF  [0402-TIGHT]  65.09,59.44 180 top
C177  4.7uF  [0402-TIGHT]  82.74,73.03 0 top
C178  22uF  [0603]  75.06,74.8 90 top
C179  0.1uF  [0402-TIGHT]  75.31,72.64 180 top
C180  22uF  [0603]  76.23,58.1 180 top
C181  0.1uF  [0402-TIGHT]  80.84,65.47 180 top
C182  0.1uF  [0402-TIGHT]  76.26,60.52 180 top
C183  10uF  [0402-TIGHT]  82.74,61.72 90 top
C184  0.1uF  [0402-TIGHT]  76.26,59.44 180 top
C185  4.7uF  [0402-TIGHT]  93.92,73.03 0 top
C186  22uF  [0603]  86.23,74.8 90 top
C187  0.1uF  [0402-TIGHT]  86.49,72.64 180 top
C188  22uF  [0603]  87.41,58.1 180 top
C189  0.1uF  [0402-TIGHT]  92.01,65.47 180 top
C190  0.1uF  [0402-TIGHT]  87.44,60.52 180 top
C191  10uF  [0402-TIGHT]  93.92,61.72 90 top
C192  0.1uF  [0402-TIGHT]  87.44,59.44 180 top
C193  4.7uF  [0402-TIGHT]  105.09,73.03 0 top
C194  22uF  [0603]  97.41,74.8 90 top
C195  0.1uF  [0402-TIGHT]  97.66,72.64 180 top
C196  22uF  [0603]  98.58,58.1 180 top
C197  0.1uF  [0402-TIGHT]  103.19,65.47 180 top
C198  0.1uF  [0402-TIGHT]  98.62,60.52 180 top
C199  10uF  [0402-TIGHT]  105.09,61.72 90 top
C200  0.1uF  [0402-TIGHT]  98.62,59.44 180 top
C201  4.7uF  [0402-TIGHT]  116.27,73.03 0 top
C202  22uF  [0603]  108.59,74.8 90 top
C203  0.1uF  [0402-TIGHT]  108.84,72.64 180 top
C204  22uF  [0603]  109.76,58.1 180 top
C205  0.1uF  [0402-TIGHT]  114.36,65.47 180 top
C206  0.1uF  [0402-TIGHT]  109.79,60.52 180 top
C207  10uF  [0402-TIGHT]  116.27,61.72 90 top
C208  0.1uF  [0402-TIGHT]  109.79,59.44 180 top
C209  4.7uF  [0402-TIGHT]  127.44,73.03 0 top
C210  22uF  [0603]  119.76,74.8 90 top
C211  0.1uF  [0402-TIGHT]  120.02,72.64 180 top
C212  22uF  [0603]  120.94,58.1 180 top
C213  0.1uF  [0402-TIGHT]  125.54,65.47 180 top
C214  0.1uF  [0402-TIGHT]  120.97,60.52 180 top
C215  10uF  [0402-TIGHT]  127.44,61.72 90 top
C216  0.1uF  [0402-TIGHT]  120.97,59.44 180 top
C217  4.7uF  [0402-TIGHT]  138.62,73.03 0 top
C218  22uF  [0603]  130.94,74.8 90 top
C219  0.1uF  [0402-TIGHT]  131.19,72.64 180 top
C220  22uF  [0603]  132.11,58.1 180 top
C221  0.1uF  [0402-TIGHT]  136.72,65.47 180 top
C222  0.1uF  [0402-TIGHT]  132.14,60.52 180 top
C223  10uF  [0402-TIGHT]  138.62,61.72 90 top
C224  0.1uF  [0402-TIGHT]  132.14,59.44 180 top
C225  4.7uF  [0402-TIGHT]  149.8,73.03 0 top
C226  22uF  [0603]  142.11,74.8 90 top
C227  0.1uF  [0402-TIGHT]  142.37,72.64 180 top
C228  22uF  [0603]  143.29,58.1 180 top
C229  0.1uF  [0402-TIGHT]  147.89,65.47 180 top
C230  0.1uF  [0402-TIGHT]  143.32,60.52 180 top
C231  10uF  [0402-TIGHT]  149.8,61.72 90 top
C232  0.1uF  [0402-TIGHT]  143.32,59.44 180 top
C233  4.7uF  [0402-TIGHT]  160.97,73.03 0 top
C234  22uF  [0603]  153.29,74.8 90 top
C235  0.1uF  [0402-TIGHT]  153.54,72.64 180 top
C236  22uF  [0603]  154.46,58.1 180 top
C237  0.1uF  [0402-TIGHT]  159.07,65.47 180 top
C238  0.1uF  [0402-TIGHT]  154.5,60.52 180 top
C239  10uF  [0402-TIGHT]  160.97,61.72 90 top
C240  0.1uF  [0402-TIGHT]  154.5,59.44 180 top
C241  4.7uF  [0402-TIGHT]  172.15,73.03 0 top
C242  22uF  [0603]  164.47,74.8 90 top
C243  0.1uF  [0402-TIGHT]  164.72,72.64 180 top
C244  22uF  [0603]  165.64,58.1 180 top
C245  0.1uF  [0402-TIGHT]  170.24,65.47 180 top
C246  0.1uF  [0402-TIGHT]  165.67,60.52 180 top
C247  10uF  [0402-TIGHT]  172.15,61.72 90 top
C248  0.1uF  [0402-TIGHT]  165.67,59.44 180 top
C249  4.7uF  [0402-TIGHT]  183.32,73.03 0 top
C250  22uF  [0603]  175.64,74.8 90 top
C251  0.1uF  [0402-TIGHT]  175.9,72.64 180 top
C252  22uF  [0603]  176.82,58.1 180 top
C253  0.1uF  [0402-TIGHT]  181.42,65.47 180 top
C254  0.1uF  [0402-TIGHT]  176.85,60.52 180 top
C255  10uF  [0402-TIGHT]  183.32,61.72 90 top
C256  0.1uF  [0402-TIGHT]  176.85,59.44 180 top
C257  4.7uF  [0402-TIGHT]  15.68,114.17 0 top
C258  22uF  [0603]  8,115.95 90 top
C259  0.1uF  [0402-TIGHT]  8.25,113.79 180 top
C260  22uF  [0603]  9.18,99.25 180 top
C261  0.1uF  [0402-TIGHT]  13.78,106.62 180 top
C262  0.1uF  [0402-TIGHT]  9.21,101.66 180 top
C263  10uF  [0402-TIGHT]  15.68,102.87 90 top
C264  0.1uF  [0402-TIGHT]  9.21,100.58 180 top
C265  4.7uF  [0402-TIGHT]  26.86,114.17 0 top
C266  22uF  [0603]  19.18,115.95 90 top
C267  0.1uF  [0402-TIGHT]  19.43,113.79 180 top
C268  22uF  [0603]  20.35,99.25 180 top
C269  0.1uF  [0402-TIGHT]  24.96,106.62 180 top
C270  0.1uF  [0402-TIGHT]  20.38,101.66 180 top
C271  10uF  [0402-TIGHT]  26.86,102.87 90 top
C272  0.1uF  [0402-TIGHT]  20.38,100.58 180 top
C273  4.7uF  [0402-TIGHT]  38.04,114.17 0 top
C274  22uF  [0603]  30.35,115.95 90 top
C275  0.1uF  [0402-TIGHT]  30.61,113.79 180 top
C276  22uF  [0603]  31.53,99.25 180 top
C277  0.1uF  [0402-TIGHT]  36.13,106.62 180 top
C278  0.1uF  [0402-TIGHT]  31.56,101.66 180 top
C279  10uF  [0402-TIGHT]  38.04,102.87 90 top
C280  0.1uF  [0402-TIGHT]  31.56,100.58 180 top
C281  4.7uF  [0402-TIGHT]  49.21,114.17 0 top
C282  22uF  [0603]  41.53,115.95 90 top
C283  0.1uF  [0402-TIGHT]  41.78,113.79 180 top
C284  22uF  [0603]  42.7,99.25 180 top
C285  0.1uF  [0402-TIGHT]  47.31,106.62 180 top
C286  0.1uF  [0402-TIGHT]  42.74,101.66 180 top
C287  10uF  [0402-TIGHT]  49.21,102.87 90 top
C288  0.1uF  [0402-TIGHT]  42.74,100.58 180 top
C289  4.7uF  [0402-TIGHT]  60.39,114.17 0 top
C290  22uF  [0603]  52.7,115.95 90 top
C291  0.1uF  [0402-TIGHT]  52.96,113.79 180 top
C292  22uF  [0603]  53.88,99.25 180 top
C293  0.1uF  [0402-TIGHT]  58.48,106.62 180 top
C294  0.1uF  [0402-TIGHT]  53.91,101.66 180 top
C295  10uF  [0402-TIGHT]  60.39,102.87 90 top
C296  0.1uF  [0402-TIGHT]  53.91,100.58 180 top
C297  4.7uF  [0402-TIGHT]  71.56,114.17 0 top
C298  22uF  [0603]  63.88,115.95 90 top
C299  0.1uF  [0402-TIGHT]  64.14,113.79 180 top
C300  22uF  [0603]  65.06,99.25 180 top
C301  0.1uF  [0402-TIGHT]  69.66,106.62 180 top
C302  0.1uF  [0402-TIGHT]  65.09,101.66 180 top
C303  10uF  [0402-TIGHT]  71.56,102.87 90 top
C304  0.1uF  [0402-TIGHT]  65.09,100.58 180 top
C305  4.7uF  [0402-TIGHT]  82.74,114.17 0 top
C306  22uF  [0603]  75.06,115.95 90 top
C307  0.1uF  [0402-TIGHT]  75.31,113.79 180 top
C308  22uF  [0603]  76.23,99.25 180 top
C309  0.1uF  [0402-TIGHT]  80.84,106.62 180 top
C310  0.1uF  [0402-TIGHT]  76.26,101.66 180 top
C311  10uF  [0402-TIGHT]  82.74,102.87 90 top
C312  0.1uF  [0402-TIGHT]  76.26,100.58 180 top
C313  4.7uF  [0402-TIGHT]  93.92,114.17 0 top
C314  22uF  [0603]  86.23,115.95 90 top
C315  0.1uF  [0402-TIGHT]  86.49,113.79 180 top
C316  22uF  [0603]  87.41,99.25 180 top
C317  0.1uF  [0402-TIGHT]  92.01,106.62 180 top
C318  0.1uF  [0402-TIGHT]  87.44,101.66 180 top
C319  10uF  [0402-TIGHT]  93.92,102.87 90 top
C320  0.1uF  [0402-TIGHT]  87.44,100.58 180 top
C321  4.7uF  [0402-TIGHT]  105.09,114.17 0 top
C322  22uF  [0603]  97.41,115.95 90 top
C323  0.1uF  [0402-TIGHT]  97.66,113.79 180 top
C324  22uF  [0603]  98.58,99.25 180 top
C325  0.1uF  [0402-TIGHT]  103.19,106.62 180 top
C326  0.1uF  [0402-TIGHT]  98.62,101.66 180 top
C327  10uF  [0402-TIGHT]  105.09,102.87 90 top
C328  0.1uF  [0402-TIGHT]  98.62,100.58 180 top
C329  4.7uF  [0402-TIGHT]  116.27,114.17 0 top
C330  22uF  [0603]  108.59,115.95 90 top
C331  0.1uF  [0402-TIGHT]  108.84,113.79 180 top
C332  22uF  [0603]  109.76,99.25 180 top
C333  0.1uF  [0402-TIGHT]  114.36,106.62 180 top
C334  0.1uF  [0402-TIGHT]  109.79,101.66 180 top
C335  10uF  [0402-TIGHT]  116.27,102.87 90 top
C336  0.1uF  [0402-TIGHT]  109.79,100.58 180 top
C337  4.7uF  [0402-TIGHT]  127.44,114.17 0 top
C338  22uF  [0603]  119.76,115.95 90 top
C339  0.1uF  [0402-TIGHT]  120.02,113.79 180 top
C340  22uF  [0603]  120.94,99.25 180 top
C341  0.1uF  [0402-TIGHT]  125.54,106.62 180 top
C342  0.1uF  [0402-TIGHT]  120.97,101.66 180 top
C343  10uF  [0402-TIGHT]  127.44,102.87 90 top
C344  0.1uF  [0402-TIGHT]  120.97,100.58 180 top
C345  4.7uF  [0402-TIGHT]  138.62,114.17 0 top
C346  22uF  [0603]  130.94,115.95 90 top
C347  0.1uF  [0402-TIGHT]  131.19,113.79 180 top
C348  22uF  [0603]  132.11,99.25 180 top
C349  0.1uF  [0402-TIGHT]  136.72,106.62 180 top
C350  0.1uF  [0402-TIGHT]  132.14,101.66 180 top
C351  10uF  [0402-TIGHT]  138.62,102.87 90 top
C352  0.1uF  [0402-TIGHT]  132.14,100.58 180 top
C353  4.7uF  [0402-TIGHT]  149.8,114.17 0 top
C354  22uF  [0603]  142.11,115.95 90 top
C355  0.1uF  [0402-TIGHT]  142.37,113.79 180 top
C356  22uF  [0603]  143.29,99.25 180 top
C357  0.1uF  [0402-TIGHT]  147.89,106.62 180 top
C358  0.1uF  [0402-TIGHT]  143.32,101.66 180 top
C359  10uF  [0402-TIGHT]  149.8,102.87 90 top
C360  0.1uF  [0402-TIGHT]  143.32,100.58 180 top
C361  4.7uF  [0402-TIGHT]  160.97,114.17 0 top
C362  22uF  [0603]  153.29,115.95 90 top
C363  0.1uF  [0402-TIGHT]  153.54,113.79 180 top
C364  22uF  [0603]  154.46,99.25 180 top
C365  0.1uF  [0402-TIGHT]  159.07,106.62 180 top
C366  0.1uF  [0402-TIGHT]  154.5,101.66 180 top
C367  10uF  [0402-TIGHT]  160.97,102.87 90 top
C368  0.1uF  [0402-TIGHT]  154.5,100.58 180 top
C369  4.7uF  [0402-TIGHT]  172.15,114.17 0 top
C370  22uF  [0603]  164.47,115.95 90 top
C371  0.1uF  [0402-TIGHT]  164.72,113.79 180 top
C372  22uF  [0603]  165.64,99.25 180 top
C373  0.1uF  [0402-TIGHT]  170.24,106.62 180 top
C374  0.1uF  [0402-TIGHT]  165.67,101.66 180 top
C375  10uF  [0402-TIGHT]  172.15,102.87 90 top
C376  0.1uF  [0402-TIGHT]  165.67,100.58 180 top
C377  4.7uF  [0402-TIGHT]  183.32,114.17 0 top
C378  22uF  [0603]  175.64,115.95 90 top
C379  0.1uF  [0402-TIGHT]  175.9,113.79 180 top
C380  22uF  [0603]  176.82,99.25 180 top
C381  0.1uF  [0402-TIGHT]  181.42,106.62 180 top
C382  0.1uF  [0402-TIGHT]  176.85,101.66 180 top
C383  10uF  [0402-TIGHT]  183.32,102.87 90 top
C384  0.1uF  [0402-TIGHT]  176.85,100.58 180 top
D1  1A/23V/620mV  [SOD-323]  10.86,30.1 0 top
D2  1A/23V/620mV  [SOD-323]  22.03,30.1 0 top
D3  1A/23V/620mV  [SOD-323]  33.21,30.1 0 top
D4  1A/23V/620mV  [SOD-323]  44.39,30.1 0 top
D5  1A/23V/620mV  [SOD-323]  55.56,30.1 0 top
D6  1A/23V/620mV  [SOD-323]  66.74,30.1 0 top
D7  1A/23V/620mV  [SOD-323]  77.91,30.1 0 top
D8  1A/23V/620mV  [SOD-323]  89.09,30.1 0 top
D9  1A/23V/620mV  [SOD-323]  100.27,30.1 0 top
D10  1A/23V/620mV  [SOD-323]  111.44,30.1 0 top
D11  1A/23V/620mV  [SOD-323]  122.62,30.1 0 top
D12  1A/23V/620mV  [SOD-323]  133.79,30.1 0 top
D13  1A/23V/620mV  [SOD-323]  144.97,30.1 0 top
D14  1A/23V/620mV  [SOD-323]  156.15,30.1 0 top
D15  1A/23V/620mV  [SOD-323]  167.32,30.1 0 top
D16  1A/23V/620mV  [SOD-323]  178.5,30.1 0 top
D17  1A/23V/620mV  [SOD-323]  10.86,71.25 0 top
D18  1A/23V/620mV  [SOD-323]  22.03,71.25 0 top
D19  1A/23V/620mV  [SOD-323]  33.21,71.25 0 top
D20  1A/23V/620mV  [SOD-323]  44.39,71.25 0 top
D21  1A/23V/620mV  [SOD-323]  55.56,71.25 0 top
D22  1A/23V/620mV  [SOD-323]  66.74,71.25 0 top
D23  1A/23V/620mV  [SOD-323]  77.91,71.25 0 top
D24  1A/23V/620mV  [SOD-323]  89.09,71.25 0 top
D25  1A/23V/620mV  [SOD-323]  100.27,71.25 0 top
D26  1A/23V/620mV  [SOD-323]  111.44,71.25 0 top
D27  1A/23V/620mV  [SOD-323]  122.62,71.25 0 top
D28  1A/23V/620mV  [SOD-323]  133.79,71.25 0 top
D29  1A/23V/620mV  [SOD-323]  144.97,71.25 0 top
D30  1A/23V/620mV  [SOD-323]  156.15,71.25 0 top
D31  1A/23V/620mV  [SOD-323]  167.32,71.25 0 top
D32  1A/23V/620mV  [SOD-323]  178.5,71.25 0 top
D33  1A/23V/620mV  [SOD-323]  10.86,112.4 0 top
D34  1A/23V/620mV  [SOD-323]  22.03,112.4 0 top
D35  1A/23V/620mV  [SOD-323]  33.21,112.4 0 top
D36  1A/23V/620mV  [SOD-323]  44.39,112.4 0 top
D37  1A/23V/620mV  [SOD-323]  55.56,112.4 0 top
D38  1A/23V/620mV  [SOD-323]  66.74,112.4 0 top
D39  1A/23V/620mV  [SOD-323]  77.91,112.4 0 top
D40  1A/23V/620mV  [SOD-323]  89.09,112.4 0 top
D41  1A/23V/620mV  [SOD-323]  100.27,112.4 0 top
D42  1A/23V/620mV  [SOD-323]  111.44,112.4 0 top
D43  1A/23V/620mV  [SOD-323]  122.62,112.4 0 top
D44  1A/23V/620mV  [SOD-323]  133.79,112.4 0 top
D45  1A/23V/620mV  [SOD-323]  144.97,112.4 0 top
D46  1A/23V/620mV  [SOD-323]  156.15,112.4 0 top
D47  1A/23V/620mV  [SOD-323]  167.32,112.4 0 top
D48  1A/23V/620mV  [SOD-323]  178.5,112.4 0 top
E$1  [FIDUCIAL-1X2]  13.72,131.89 0 top
E$2  [FIDUCIAL-1X2]  13.72,131.89 0 bottom
E$3  [FIDUCIAL-1X2]  178.24,131.89 0 top
E$4  [FIDUCIAL-1X2]  178.24,131.89 0 bottom
E$5  [FIDUCIAL-1.5X3]  13.72,4.76 0 top
E$6  [FIDUCIAL-1.5X3]  13.72,4.76 0 bottom
FD1  FIDUCIALUFIDUCIAL  [FIDUCIAL-MICRO]  7.49,46.86 0 top
FD2  FIDUCIALUFIDUCIAL  [FIDUCIAL-MICRO]  7.49,46.86 0 bottom
FD3  FIDUCIALUFIDUCIAL  [FIDUCIAL-MICRO]  16.89,7.49 0 top
FD4  FIDUCIALUFIDUCIAL  [FIDUCIAL-MICRO]  16.89,7.49 0 bottom
FD5  FIDUCIALUFIDUCIAL  [FIDUCIAL-MICRO]  18.67,46.86 0 top
FD6  FIDUCIALUFIDUCIAL  [FIDUCIAL-MICRO]  18.67,46.86 0 bottom
FD7  FIDUCIALUFIDUCIAL  [FIDUCIAL-MICRO]  28.07,7.49 0 top
FD8  FIDUCIALUFIDUCIAL  [FIDUCIAL-MICRO]  28.07,7.49 0 bottom
FD9  FIDUCIALUFIDUCIAL  [FIDUCIAL-MICRO]  29.84,46.86 0 top
FD10  FIDUCIALUFIDUCIAL  [FIDUCIAL-MICRO]  29.84,46.86 0 bottom
FD11  FIDUCIALUFIDUCIAL  [FIDUCIAL-MICRO]  39.24,7.49 0 top
FD12  FIDUCIALUFIDUCIAL  [FIDUCIAL-MICRO]  39.24,7.49 0 bottom
FD13  FIDUCIALUFIDUCIAL  [FIDUCIAL-MICRO]  41.02,46.86 0 top
FD14  FIDUCIALUFIDUCIAL  [FIDUCIAL-MICRO]  41.02,46.86 0 bottom
FD15  FIDUCIALUFIDUCIAL  [FIDUCIAL-MICRO]  50.42,7.49 0 top
FD16  FIDUCIALUFIDUCIAL  [FIDUCIAL-MICRO]  50.42,7.49 0 bottom
FD17  FIDUCIALUFIDUCIAL  [FIDUCIAL-MICRO]  52.2,46.86 0 top
FD18  FIDUCIALUFIDUCIAL  [FIDUCIAL-MICRO]  52.2,46.86 0 bottom
FD19  FIDUCIALUFIDUCIAL  [FIDUCIAL-MICRO]  61.59,7.49 0 top
FD20  FIDUCIALUFIDUCIAL  [FIDUCIAL-MICRO]  61.59,7.49 0 bottom
FD21  FIDUCIALUFIDUCIAL  [FIDUCIAL-MICRO]  63.37,46.86 0 top
FD22  FIDUCIALUFIDUCIAL  [FIDUCIAL-MICRO]  63.37,46.86 0 bottom
FD23  FIDUCIALUFIDUCIAL  [FIDUCIAL-MICRO]  72.77,7.49 0 top
FD24  FIDUCIALUFIDUCIAL  [FIDUCIAL-MICRO]  72.77,7.49 0 bottom
FD25  FIDUCIALUFIDUCIAL  [FIDUCIAL-MICRO]  74.55,46.86 0 top
FD26  FIDUCIALUFIDUCIAL  [FIDUCIAL-MICRO]  74.55,46.86 0 bottom
FD27  FIDUCIALUFIDUCIAL  [FIDUCIAL-MICRO]  83.95,7.49 0 top
FD28  FIDUCIALUFIDUCIAL  [FIDUCIAL-MICRO]  83.95,7.49 0 bottom
FD29  FIDUCIALUFIDUCIAL  [FIDUCIAL-MICRO]  85.73,46.86 0 top
FD30  FIDUCIALUFIDUCIAL  [FIDUCIAL-MICRO]  85.73,46.86 0 bottom
FD31  FIDUCIALUFIDUCIAL  [FIDUCIAL-MICRO]  95.12,7.49 0 top
FD32  FIDUCIALUFIDUCIAL  [FIDUCIAL-MICRO]  95.12,7.49 0 bottom
FD33  FIDUCIALUFIDUCIAL  [FIDUCIAL-MICRO]  96.9,46.86 0 top
FD34  FIDUCIALUFIDUCIAL  [FIDUCIAL-MICRO]  96.9,46.86 0 bottom
FD35  FIDUCIALUFIDUCIAL  [FIDUCIAL-MICRO]  106.3,7.49 0 top
FD36  FIDUCIALUFIDUCIAL  [FIDUCIAL-MICRO]  106.3,7.49 0 bottom
FD37  FIDUCIALUFIDUCIAL  [FIDUCIAL-MICRO]  108.08,46.86 0 top
FD38  FIDUCIALUFIDUCIAL  [FIDUCIAL-MICRO]  108.08,46.86 0 bottom
FD39  FIDUCIALUFIDUCIAL  [FIDUCIAL-MICRO]  117.48,7.49 0 top
FD40  FIDUCIALUFIDUCIAL  [FIDUCIAL-MICRO]  117.48,7.49 0 bottom
FD41  FIDUCIALUFIDUCIAL  [FIDUCIAL-MICRO]  119.25,46.86 0 top
FD42  FIDUCIALUFIDUCIAL  [FIDUCIAL-MICRO]  119.25,46.86 0 bottom
FD43  FIDUCIALUFIDUCIAL  [FIDUCIAL-MICRO]  128.65,7.49 0 top
FD44  FIDUCIALUFIDUCIAL  [FIDUCIAL-MICRO]  128.65,7.49 0 bottom
FD45  FIDUCIALUFIDUCIAL  [FIDUCIAL-MICRO]  130.43,46.86 0 top
FD46  FIDUCIALUFIDUCIAL  [FIDUCIAL-MICRO]  130.43,46.86 0 bottom
FD47  FIDUCIALUFIDUCIAL  [FIDUCIAL-MICRO]  139.83,7.49 0 top
FD48  FIDUCIALUFIDUCIAL  [FIDUCIAL-MICRO]  139.83,7.49 0 bottom
FD49  FIDUCIALUFIDUCIAL  [FIDUCIAL-MICRO]  141.61,46.86 0 top
FD50  FIDUCIALUFIDUCIAL  [FIDUCIAL-MICRO]  141.61,46.86 0 bottom
FD51  FIDUCIALUFIDUCIAL  [FIDUCIAL-MICRO]  151,7.49 0 top
FD52  FIDUCIALUFIDUCIAL  [FIDUCIAL-MICRO]  151,7.49 0 bottom
FD53  FIDUCIALUFIDUCIAL  [FIDUCIAL-MICRO]  152.78,46.86 0 top
FD54  FIDUCIALUFIDUCIAL  [FIDUCIAL-MICRO]  152.78,46.86 0 bottom
FD55  FIDUCIALUFIDUCIAL  [FIDUCIAL-MICRO]  162.18,7.49 0 top
FD56  FIDUCIALUFIDUCIAL  [FIDUCIAL-MICRO]  162.18,7.49 0 bottom
FD57  FIDUCIALUFIDUCIAL  [FIDUCIAL-MICRO]  163.96,46.86 0 top
FD58  FIDUCIALUFIDUCIAL  [FIDUCIAL-MICRO]  163.96,46.86 0 bottom
FD59  FIDUCIALUFIDUCIAL  [FIDUCIAL-MICRO]  173.36,7.49 0 top
FD60  FIDUCIALUFIDUCIAL  [FIDUCIAL-MICRO]  173.36,7.49 0 bottom
FD61  FIDUCIALUFIDUCIAL  [FIDUCIAL-MICRO]  175.13,46.86 0 top
FD62  FIDUCIALUFIDUCIAL  [FIDUCIAL-MICRO]  175.13,46.86 0 bottom
FD63  FIDUCIALUFIDUCIAL  [FIDUCIAL-MICRO]  184.53,7.49 0 top
FD64  FIDUCIALUFIDUCIAL  [FIDUCIAL-MICRO]  184.53,7.49 0 bottom
FD65  FIDUCIALUFIDUCIAL  [FIDUCIAL-MICRO]  7.49,88.01 0 top
FD66  FIDUCIALUFIDUCIAL  [FIDUCIAL-MICRO]  7.49,88.01 0 bottom
FD67  FIDUCIALUFIDUCIAL  [FIDUCIAL-MICRO]  16.89,48.64 0 top
FD68  FIDUCIALUFIDUCIAL  [FIDUCIAL-MICRO]  16.89,48.64 0 bottom
FD69  FIDUCIALUFIDUCIAL  [FIDUCIAL-MICRO]  18.67,88.01 0 top
FD70  FIDUCIALUFIDUCIAL  [FIDUCIAL-MICRO]  18.67,88.01 0 bottom
FD71  FIDUCIALUFIDUCIAL  [FIDUCIAL-MICRO]  28.07,48.64 0 top
FD72  FIDUCIALUFIDUCIAL  [FIDUCIAL-MICRO]  28.07,48.64 0 bottom
FD73  FIDUCIALUFIDUCIAL  [FIDUCIAL-MICRO]  29.84,88.01 0 top
FD74  FIDUCIALUFIDUCIAL  [FIDUCIAL-MICRO]  29.84,88.01 0 bottom
FD75  FIDUCIALUFIDUCIAL  [FIDUCIAL-MICRO]  39.24,48.64 0 top
FD76  FIDUCIALUFIDUCIAL  [FIDUCIAL-MICRO]  39.24,48.64 0 bottom
FD77  FIDUCIALUFIDUCIAL  [FIDUCIAL-MICRO]  41.02,88.01 0 top
FD78  FIDUCIALUFIDUCIAL  [FIDUCIAL-MICRO]  41.02,88.01 0 bottom
FD79  FIDUCIALUFIDUCIAL  [FIDUCIAL-MICRO]  50.42,48.64 0 top
FD80  FIDUCIALUFIDUCIAL  [FIDUCIAL-MICRO]  50.42,48.64 0 bottom
FD81  FIDUCIALUFIDUCIAL  [FIDUCIAL-MICRO]  52.2,88.01 0 top
FD82  FIDUCIALUFIDUCIAL  [FIDUCIAL-MICRO]  52.2,88.01 0 bottom
FD83  FIDUCIALUFIDUCIAL  [FIDUCIAL-MICRO]  61.59,48.64 0 top
FD84  FIDUCIALUFIDUCIAL  [FIDUCIAL-MICRO]  61.59,48.64 0 bottom
FD85  FIDUCIALUFIDUCIAL  [FIDUCIAL-MICRO]  63.37,88.01 0 top
FD86  FIDUCIALUFIDUCIAL  [FIDUCIAL-MICRO]  63.37,88.01 0 bottom
FD87  FIDUCIALUFIDUCIAL  [FIDUCIAL-MICRO]  72.77,48.64 0 top
FD88  FIDUCIALUFIDUCIAL  [FIDUCIAL-MICRO]  72.77,48.64 0 bottom
FD89  FIDUCIALUFIDUCIAL  [FIDUCIAL-MICRO]  74.55,88.01 0 top
FD90  FIDUCIALUFIDUCIAL  [FIDUCIAL-MICRO]  74.55,88.01 0 bottom
FD91  FIDUCIALUFIDUCIAL  [FIDUCIAL-MICRO]  83.95,48.64 0 top
FD92  FIDUCIALUFIDUCIAL  [FIDUCIAL-MICRO]  83.95,48.64 0 bottom
FD93  FIDUCIALUFIDUCIAL  [FIDUCIAL-MICRO]  85.73,88.01 0 top
FD94  FIDUCIALUFIDUCIAL  [FIDUCIAL-MICRO]  85.73,88.01 0 bottom
FD95  FIDUCIALUFIDUCIAL  [FIDUCIAL-MICRO]  95.12,48.64 0 top
FD96  FIDUCIALUFIDUCIAL  [FIDUCIAL-MICRO]  95.12,48.64 0 bottom
FD97  FIDUCIALUFIDUCIAL  [FIDUCIAL-MICRO]  96.9,88.01 0 top
FD98  FIDUCIALUFIDUCIAL  [FIDUCIAL-MICRO]  96.9,88.01 0 bottom
FD99  FIDUCIALUFIDUCIAL  [FIDUCIAL-MICRO]  106.3,48.64 0 top
FD100  FIDUCIALUFIDUCIAL  [FIDUCIAL-MICRO]  106.3,48.64 0 bottom
FD101  FIDUCIALUFIDUCIAL  [FIDUCIAL-MICRO]  108.08,88.01 0 top
FD102  FIDUCIALUFIDUCIAL  [FIDUCIAL-MICRO]  108.08,88.01 0 bottom
FD103  FIDUCIALUFIDUCIAL  [FIDUCIAL-MICRO]  117.48,48.64 0 top
FD104  FIDUCIALUFIDUCIAL  [FIDUCIAL-MICRO]  117.48,48.64 0 bottom
FD105  FIDUCIALUFIDUCIAL  [FIDUCIAL-MICRO]  119.25,88.01 0 top
FD106  FIDUCIALUFIDUCIAL  [FIDUCIAL-MICRO]  119.25,88.01 0 bottom
FD107  FIDUCIALUFIDUCIAL  [FIDUCIAL-MICRO]  128.65,48.64 0 top
FD108  FIDUCIALUFIDUCIAL  [FIDUCIAL-MICRO]  128.65,48.64 0 bottom
FD109  FIDUCIALUFIDUCIAL  [FIDUCIAL-MICRO]  130.43,88.01 0 top
FD110  FIDUCIALUFIDUCIAL  [FIDUCIAL-MICRO]  130.43,88.01 0 bottom
FD111  FIDUCIALUFIDUCIAL  [FIDUCIAL-MICRO]  139.83,48.64 0 top
FD112  FIDUCIALUFIDUCIAL  [FIDUCIAL-MICRO]  139.83,48.64 0 bottom
FD113  FIDUCIALUFIDUCIAL  [FIDUCIAL-MICRO]  141.61,88.01 0 top
FD114  FIDUCIALUFIDUCIAL  [FIDUCIAL-MICRO]  141.61,88.01 0 bottom
FD115  FIDUCIALUFIDUCIAL  [FIDUCIAL-MICRO]  151,48.64 0 top
FD116  FIDUCIALUFIDUCIAL  [FIDUCIAL-MICRO]  151,48.64 0 bottom
FD117  FIDUCIALUFIDUCIAL  [FIDUCIAL-MICRO]  152.78,88.01 0 top
FD118  FIDUCIALUFIDUCIAL  [FIDUCIAL-MICRO]  152.78,88.01 0 bottom
FD119  FIDUCIALUFIDUCIAL  [FIDUCIAL-MICRO]  162.18,48.64 0 top
FD120  FIDUCIALUFIDUCIAL  [FIDUCIAL-MICRO]  162.18,48.64 0 bottom
FD121  FIDUCIALUFIDUCIAL  [FIDUCIAL-MICRO]  163.96,88.01 0 top
FD122  FIDUCIALUFIDUCIAL  [FIDUCIAL-MICRO]  163.96,88.01 0 bottom
FD123  FIDUCIALUFIDUCIAL  [FIDUCIAL-MICRO]  173.36,48.64 0 top
FD124  FIDUCIALUFIDUCIAL  [FIDUCIAL-MICRO]  173.36,48.64 0 bottom
FD125  FIDUCIALUFIDUCIAL  [FIDUCIAL-MICRO]  175.13,88.01 0 top
FD126  FIDUCIALUFIDUCIAL  [FIDUCIAL-MICRO]  175.13,88.01 0 bottom
FD127  FIDUCIALUFIDUCIAL  [FIDUCIAL-MICRO]  184.53,48.64 0 top
FD128  FIDUCIALUFIDUCIAL  [FIDUCIAL-MICRO]  184.53,48.64 0 bottom
FD129  FIDUCIALUFIDUCIAL  [FIDUCIAL-MICRO]  7.49,129.16 0 top
FD130  FIDUCIALUFIDUCIAL  [FIDUCIAL-MICRO]  7.49,129.16 0 bottom
FD131  FIDUCIALUFIDUCIAL  [FIDUCIAL-MICRO]  16.89,89.79 0 top
FD132  FIDUCIALUFIDUCIAL  [FIDUCIAL-MICRO]  16.89,89.79 0 bottom
FD133  FIDUCIALUFIDUCIAL  [FIDUCIAL-MICRO]  18.67,129.16 0 top
FD134  FIDUCIALUFIDUCIAL  [FIDUCIAL-MICRO]  18.67,129.16 0 bottom
FD135  FIDUCIALUFIDUCIAL  [FIDUCIAL-MICRO]  28.07,89.79 0 top
FD136  FIDUCIALUFIDUCIAL  [FIDUCIAL-MICRO]  28.07,89.79 0 bottom
FD137  FIDUCIALUFIDUCIAL  [FIDUCIAL-MICRO]  29.84,129.16 0 top
FD138  FIDUCIALUFIDUCIAL  [FIDUCIAL-MICRO]  29.84,129.16 0 bottom
FD139  FIDUCIALUFIDUCIAL  [FIDUCIAL-MICRO]  39.24,89.79 0 top
FD140  FIDUCIALUFIDUCIAL  [FIDUCIAL-MICRO]  39.24,89.79 0 bottom
FD141  FIDUCIALUFIDUCIAL  [FIDUCIAL-MICRO]  41.02,129.16 0 top
FD142  FIDUCIALUFIDUCIAL  [FIDUCIAL-MICRO]  41.02,129.16 0 bottom
FD143  FIDUCIALUFIDUCIAL  [FIDUCIAL-MICRO]  50.42,89.79 0 top
FD144  FIDUCIALUFIDUCIAL  [FIDUCIAL-MICRO]  50.42,89.79 0 bottom
FD145  FIDUCIALUFIDUCIAL  [FIDUCIAL-MICRO]  52.2,129.16 0 top
FD146  FIDUCIALUFIDUCIAL  [FIDUCIAL-MICRO]  52.2,129.16 0 bottom
FD147  FIDUCIALUFIDUCIAL  [FIDUCIAL-MICRO]  61.59,89.79 0 top
FD148  FIDUCIALUFIDUCIAL  [FIDUCIAL-MICRO]  61.59,89.79 0 bottom
FD149  FIDUCIALUFIDUCIAL  [FIDUCIAL-MICRO]  63.37,129.16 0 top
FD150  FIDUCIALUFIDUCIAL  [FIDUCIAL-MICRO]  63.37,129.16 0 bottom
FD151  FIDUCIALUFIDUCIAL  [FIDUCIAL-MICRO]  72.77,89.79 0 top
FD152  FIDUCIALUFIDUCIAL  [FIDUCIAL-MICRO]  72.77,89.79 0 bottom
FD153  FIDUCIALUFIDUCIAL  [FIDUCIAL-MICRO]  74.55,129.16 0 top
FD154  FIDUCIALUFIDUCIAL  [FIDUCIAL-MICRO]  74.55,129.16 0 bottom
FD155  FIDUCIALUFIDUCIAL  [FIDUCIAL-MICRO]  83.95,89.79 0 top
FD156  FIDUCIALUFIDUCIAL  [FIDUCIAL-MICRO]  83.95,89.79 0 bottom
FD157  FIDUCIALUFIDUCIAL  [FIDUCIAL-MICRO]  85.73,129.16 0 top
FD158  FIDUCIALUFIDUCIAL  [FIDUCIAL-MICRO]  85.73,129.16 0 bottom
FD159  FIDUCIALUFIDUCIAL  [FIDUCIAL-MICRO]  95.12,89.79 0 top
FD160  FIDUCIALUFIDUCIAL  [FIDUCIAL-MICRO]  95.12,89.79 0 bottom
FD161  FIDUCIALUFIDUCIAL  [FIDUCIAL-MICRO]  96.9,129.16 0 top
FD162  FIDUCIALUFIDUCIAL  [FIDUCIAL-MICRO]  96.9,129.16 0 bottom
FD163  FIDUCIALUFIDUCIAL  [FIDUCIAL-MICRO]  106.3,89.79 0 top
FD164  FIDUCIALUFIDUCIAL  [FIDUCIAL-MICRO]  106.3,89.79 0 bottom
FD165  FIDUCIALUFIDUCIAL  [FIDUCIAL-MICRO]  108.08,129.16 0 top
FD166  FIDUCIALUFIDUCIAL  [FIDUCIAL-MICRO]  108.08,129.16 0 bottom
FD167  FIDUCIALUFIDUCIAL  [FIDUCIAL-MICRO]  117.48,89.79 0 top
FD168  FIDUCIALUFIDUCIAL  [FIDUCIAL-MICRO]  117.48,89.79 0 bottom
FD169  FIDUCIALUFIDUCIAL  [FIDUCIAL-MICRO]  119.25,129.16 0 top
FD170  FIDUCIALUFIDUCIAL  [FIDUCIAL-MICRO]  119.25,129.16 0 bottom
FD171  FIDUCIALUFIDUCIAL  [FIDUCIAL-MICRO]  128.65,89.79 0 top
FD172  FIDUCIALUFIDUCIAL  [FIDUCIAL-MICRO]  128.65,89.79 0 bottom
FD173  FIDUCIALUFIDUCIAL  [FIDUCIAL-MICRO]  130.43,129.16 0 top
FD174  FIDUCIALUFIDUCIAL  [FIDUCIAL-MICRO]  130.43,129.16 0 bottom
FD175  FIDUCIALUFIDUCIAL  [FIDUCIAL-MICRO]  139.83,89.79 0 top
FD176  FIDUCIALUFIDUCIAL  [FIDUCIAL-MICRO]  139.83,89.79 0 bottom
FD177  FIDUCIALUFIDUCIAL  [FIDUCIAL-MICRO]  141.61,129.16 0 top
FD178  FIDUCIALUFIDUCIAL  [FIDUCIAL-MICRO]  141.61,129.16 0 bottom
FD179  FIDUCIALUFIDUCIAL  [FIDUCIAL-MICRO]  151,89.79 0 top
FD180  FIDUCIALUFIDUCIAL  [FIDUCIAL-MICRO]  151,89.79 0 bottom
FD181  FIDUCIALUFIDUCIAL  [FIDUCIAL-MICRO]  152.78,129.16 0 top
FD182  FIDUCIALUFIDUCIAL  [FIDUCIAL-MICRO]  152.78,129.16 0 bottom
FD183  FIDUCIALUFIDUCIAL  [FIDUCIAL-MICRO]  162.18,89.79 0 top
FD184  FIDUCIALUFIDUCIAL  [FIDUCIAL-MICRO]  162.18,89.79 0 bottom
FD185  FIDUCIALUFIDUCIAL  [FIDUCIAL-MICRO]  163.96,129.16 0 top
FD186  FIDUCIALUFIDUCIAL  [FIDUCIAL-MICRO]  163.96,129.16 0 bottom
FD187  FIDUCIALUFIDUCIAL  [FIDUCIAL-MICRO]  173.36,89.79 0 top
FD188  FIDUCIALUFIDUCIAL  [FIDUCIAL-MICRO]  173.36,89.79 0 bottom
FD189  FIDUCIALUFIDUCIAL  [FIDUCIAL-MICRO]  175.13,129.16 0 top
FD190  FIDUCIALUFIDUCIAL  [FIDUCIAL-MICRO]  175.13,129.16 0 bottom
FD191  FIDUCIALUFIDUCIAL  [FIDUCIAL-MICRO]  184.53,89.79 0 top
FD192  FIDUCIALUFIDUCIAL  [FIDUCIAL-MICRO]  184.53,89.79 0 bottom
IN  FPC_16_0.5MM_BACKFLIP  [FPC_16_DOUBLESIDED_BACKFLIP]  12.19,45.4 0 bottom
IN1  FPC_16_0.5MM_BACKFLIP  [FPC_16_DOUBLESIDED_BACKFLIP]  23.37,45.4 0 bottom
IN2  FPC_16_0.5MM_BACKFLIP  [FPC_16_DOUBLESIDED_BACKFLIP]  34.54,45.4 0 bottom
IN3  FPC_16_0.5MM_BACKFLIP  [FPC_16_DOUBLESIDED_BACKFLIP]  45.72,45.4 0 bottom
IN4  FPC_16_0.5MM_BACKFLIP  [FPC_16_DOUBLESIDED_BACKFLIP]  56.9,45.4 0 bottom
IN5  FPC_16_0.5MM_BACKFLIP  [FPC_16_DOUBLESIDED_BACKFLIP]  68.07,45.4 0 bottom
IN6  FPC_16_0.5MM_BACKFLIP  [FPC_16_DOUBLESIDED_BACKFLIP]  79.25,45.4 0 bottom
IN7  FPC_16_0.5MM_BACKFLIP  [FPC_16_DOUBLESIDED_BACKFLIP]  90.42,45.4 0 bottom
IN8  FPC_16_0.5MM_BACKFLIP  [FPC_16_DOUBLESIDED_BACKFLIP]  101.6,45.4 0 bottom
IN9  FPC_16_0.5MM_BACKFLIP  [FPC_16_DOUBLESIDED_BACKFLIP]  112.78,45.4 0 bottom
IN10  FPC_16_0.5MM_BACKFLIP  [FPC_16_DOUBLESIDED_BACKFLIP]  123.95,45.4 0 bottom
IN11  FPC_16_0.5MM_BACKFLIP  [FPC_16_DOUBLESIDED_BACKFLIP]  135.13,45.4 0 bottom
IN12  FPC_16_0.5MM_BACKFLIP  [FPC_16_DOUBLESIDED_BACKFLIP]  146.3,45.4 0 bottom
IN13  FPC_16_0.5MM_BACKFLIP  [FPC_16_DOUBLESIDED_BACKFLIP]  157.48,45.4 0 bottom
IN14  FPC_16_0.5MM_BACKFLIP  [FPC_16_DOUBLESIDED_BACKFLIP]  168.66,45.4 0 bottom
IN15  FPC_16_0.5MM_BACKFLIP  [FPC_16_DOUBLESIDED_BACKFLIP]  179.83,45.4 0 bottom
IN16  FPC_16_0.5MM_BACKFLIP  [FPC_16_DOUBLESIDED_BACKFLIP]  12.19,86.55 0 bottom
IN17  FPC_16_0.5MM_BACKFLIP  [FPC_16_DOUBLESIDED_BACKFLIP]  23.37,86.55 0 bottom
IN18  FPC_16_0.5MM_BACKFLIP  [FPC_16_DOUBLESIDED_BACKFLIP]  34.54,86.55 0 bottom
IN19  FPC_16_0.5MM_BACKFLIP  [FPC_16_DOUBLESIDED_BACKFLIP]  45.72,86.55 0 bottom
IN20  FPC_16_0.5MM_BACKFLIP  [FPC_16_DOUBLESIDED_BACKFLIP]  56.9,86.55 0 bottom
IN21  FPC_16_0.5MM_BACKFLIP  [FPC_16_DOUBLESIDED_BACKFLIP]  68.07,86.55 0 bottom
IN22  FPC_16_0.5MM_BACKFLIP  [FPC_16_DOUBLESIDED_BACKFLIP]  79.25,86.55 0 bottom
IN23  FPC_16_0.5MM_BACKFLIP  [FPC_16_DOUBLESIDED_BACKFLIP]  90.42,86.55 0 bottom
IN24  FPC_16_0.5MM_BACKFLIP  [FPC_16_DOUBLESIDED_BACKFLIP]  101.6,86.55 0 bottom
IN25  FPC_16_0.5MM_BACKFLIP  [FPC_16_DOUBLESIDED_BACKFLIP]  112.78,86.55 0 bottom
IN26  FPC_16_0.5MM_BACKFLIP  [FPC_16_DOUBLESIDED_BACKFLIP]  123.95,86.55 0 bottom
IN27  FPC_16_0.5MM_BACKFLIP  [FPC_16_DOUBLESIDED_BACKFLIP]  135.13,86.55 0 bottom
IN28  FPC_16_0.5MM_BACKFLIP  [FPC_16_DOUBLESIDED_BACKFLIP]  146.3,86.55 0 bottom
IN29  FPC_16_0.5MM_BACKFLIP  [FPC_16_DOUBLESIDED_BACKFLIP]  157.48,86.55 0 bottom
IN30  FPC_16_0.5MM_BACKFLIP  [FPC_16_DOUBLESIDED_BACKFLIP]  168.66,86.55 0 bottom
IN31  FPC_16_0.5MM_BACKFLIP  [FPC_16_DOUBLESIDED_BACKFLIP]  179.83,86.55 0 bottom
IN32  FPC_16_0.5MM_BACKFLIP  [FPC_16_DOUBLESIDED_BACKFLIP]  12.19,127.7 0 bottom
IN33  FPC_16_0.5MM_BACKFLIP  [FPC_16_DOUBLESIDED_BACKFLIP]  23.37,127.7 0 bottom
IN34  FPC_16_0.5MM_BACKFLIP  [FPC_16_DOUBLESIDED_BACKFLIP]  34.54,127.7 0 bottom
IN35  FPC_16_0.5MM_BACKFLIP  [FPC_16_DOUBLESIDED_BACKFLIP]  45.72,127.7 0 bottom
IN36  FPC_16_0.5MM_BACKFLIP  [FPC_16_DOUBLESIDED_BACKFLIP]  56.9,127.7 0 bottom
IN37  FPC_16_0.5MM_BACKFLIP  [FPC_16_DOUBLESIDED_BACKFLIP]  68.07,127.7 0 bottom
IN38  FPC_16_0.5MM_BACKFLIP  [FPC_16_DOUBLESIDED_BACKFLIP]  79.25,127.7 0 bottom
IN39  FPC_16_0.5MM_BACKFLIP  [FPC_16_DOUBLESIDED_BACKFLIP]  90.42,127.7 0 bottom
IN40  FPC_16_0.5MM_BACKFLIP  [FPC_16_DOUBLESIDED_BACKFLIP]  101.6,127.7 0 bottom
IN41  FPC_16_0.5MM_BACKFLIP  [FPC_16_DOUBLESIDED_BACKFLIP]  112.78,127.7 0 bottom
IN42  FPC_16_0.5MM_BACKFLIP  [FPC_16_DOUBLESIDED_BACKFLIP]  123.95,127.7 0 bottom
IN43  FPC_16_0.5MM_BACKFLIP  [FPC_16_DOUBLESIDED_BACKFLIP]  135.13,127.7 0 bottom
IN44  FPC_16_0.5MM_BACKFLIP  [FPC_16_DOUBLESIDED_BACKFLIP]  146.3,127.7 0 bottom
IN45  FPC_16_0.5MM_BACKFLIP  [FPC_16_DOUBLESIDED_BACKFLIP]  157.48,127.7 0 bottom
IN46  FPC_16_0.5MM_BACKFLIP  [FPC_16_DOUBLESIDED_BACKFLIP]  168.66,127.7 0 bottom
IN47  FPC_16_0.5MM_BACKFLIP  [FPC_16_DOUBLESIDED_BACKFLIP]  179.83,127.7 0 bottom
J1  [JST-2-SMD]  12.19,44.01 0 top
J2  [JST-2-SMD]  23.37,44.01 0 top
J3  AVR_SPI_PROG_3X2TESTPOINTS  [2X3_TEST_POINTS]  12.19,27.18 0 bottom
J4  AVR_SPI_PROG_3X2TESTPOINTS  [2X3_TEST_POINTS]  23.37,27.18 0 bottom
J5  [JST-2-SMD]  34.54,44.01 0 top
J6  AVR_SPI_PROG_3X2TESTPOINTS  [2X3_TEST_POINTS]  34.54,27.18 0 bottom
J7  [JST-2-SMD]  45.72,44.01 0 top
J8  AVR_SPI_PROG_3X2TESTPOINTS  [2X3_TEST_POINTS]  45.72,27.18 0 bottom
J9  [JST-2-SMD]  56.9,44.01 0 top
J10  AVR_SPI_PROG_3X2TESTPOINTS  [2X3_TEST_POINTS]  56.9,27.18 0 bottom
J11  [JST-2-SMD]  68.07,44.01 0 top
J12  AVR_SPI_PROG_3X2TESTPOINTS  [2X3_TEST_POINTS]  68.07,27.18 0 bottom
J13  [JST-2-SMD]  79.25,44.01 0 top
J14  AVR_SPI_PROG_3X2TESTPOINTS  [2X3_TEST_POINTS]  79.25,27.18 0 bottom
J15  [JST-2-SMD]  90.42,44.01 0 top
J16  AVR_SPI_PROG_3X2TESTPOINTS  [2X3_TEST_POINTS]  90.42,27.18 0 bottom
J17  [JST-2-SMD]  101.6,44.01 0 top
J18  AVR_SPI_PROG_3X2TESTPOINTS  [2X3_TEST_POINTS]  101.6,27.18 0 bottom
J19  [JST-2-SMD]  112.78,44.01 0 top
J20  AVR_SPI_PROG_3X2TESTPOINTS  [2X3_TEST_POINTS]  112.78,27.18 0 bottom
J21  [JST-2-SMD]  123.95,44.01 0 top
J22  AVR_SPI_PROG_3X2TESTPOINTS  [2X3_TEST_POINTS]  123.95,27.18 0 bottom
J23  [JST-2-SMD]  135.13,44.01 0 top
J24  AVR_SPI_PROG_3X2TESTPOINTS  [2X3_TEST_POINTS]  135.13,27.18 0 bottom
J25  [JST-2-SMD]  146.3,44.01 0 top
J26  AVR_SPI_PROG_3X2TESTPOINTS  [2X3_TEST_POINTS]  146.3,27.18 0 bottom
J27  [JST-2-SMD]  157.48,44.01 0 top
J28  AVR_SPI_PROG_3X2TESTPOINTS  [2X3_TEST_POINTS]  157.48,27.18 0 bottom
J29  [JST-2-SMD]  168.66,44.01 0 top
J30  AVR_SPI_PROG_3X2TESTPOINTS  [2X3_TEST_POINTS]  168.66,27.18 0 bottom
J31  [JST-2-SMD]  179.83,44.01 0 top
J32  AVR_SPI_PROG_3X2TESTPOINTS  [2X3_TEST_POINTS]  179.83,27.18 0 bottom
J33  [JST-2-SMD]  12.19,85.15 0 top
J34  AVR_SPI_PROG_3X2TESTPOINTS  [2X3_TEST_POINTS]  12.19,68.33 0 bottom
J35  [JST-2-SMD]  23.37,85.15 0 top
J36  AVR_SPI_PROG_3X2TESTPOINTS  [2X3_TEST_POINTS]  23.37,68.33 0 bottom
J37  [JST-2-SMD]  34.54,85.15 0 top
J38  AVR_SPI_PROG_3X2TESTPOINTS  [2X3_TEST_POINTS]  34.54,68.33 0 bottom
J39  [JST-2-SMD]  45.72,85.15 0 top
J40  AVR_SPI_PROG_3X2TESTPOINTS  [2X3_TEST_POINTS]  45.72,68.33 0 bottom
J41  [JST-2-SMD]  56.9,85.15 0 top
J42  AVR_SPI_PROG_3X2TESTPOINTS  [2X3_TEST_POINTS]  56.9,68.33 0 bottom
J43  [JST-2-SMD]  68.07,85.15 0 top
J44  AVR_SPI_PROG_3X2TESTPOINTS  [2X3_TEST_POINTS]  68.07,68.33 0 bottom
J45  [JST-2-SMD]  79.25,85.15 0 top
J46  AVR_SPI_PROG_3X2TESTPOINTS  [2X3_TEST_POINTS]  79.25,68.33 0 bottom
J47  [JST-2-SMD]  90.42,85.15 0 top
J48  AVR_SPI_PROG_3X2TESTPOINTS  [2X3_TEST_POINTS]  90.42,68.33 0 bottom
J49  [JST-2-SMD]  101.6,85.15 0 top
J50  AVR_SPI_PROG_3X2TESTPOINTS  [2X3_TEST_POINTS]  101.6,68.33 0 bottom
J51  [JST-2-SMD]  112.78,85.15 0 top
J52  AVR_SPI_PROG_3X2TESTPOINTS  [2X3_TEST_POINTS]  112.78,68.33 0 bottom
J53  [JST-2-SMD]  123.95,85.15 0 top
J54  AVR_SPI_PROG_3X2TESTPOINTS  [2X3_TEST_POINTS]  123.95,68.33 0 bottom
J55  [JST-2-SMD]  135.13,85.15 0 top
J56  AVR_SPI_PROG_3X2TESTPOINTS  [2X3_TEST_POINTS]  135.13,68.33 0 bottom
J57  [JST-2-SMD]  146.3,85.15 0 top
J58  AVR_SPI_PROG_3X2TESTPOINTS  [2X3_TEST_POINTS]  146.3,68.33 0 bottom
J59  [JST-2-SMD]  157.48,85.15 0 top
J60  AVR_SPI_PROG_3X2TESTPOINTS  [2X3_TEST_POINTS]  157.48,68.33 0 bottom
J61  [JST-2-SMD]  168.66,85.15 0 top
J62  AVR_SPI_PROG_3X2TESTPOINTS  [2X3_TEST_POINTS]  168.66,68.33 0 bottom
J63  [JST-2-SMD]  179.83,85.15 0 top
J64  AVR_SPI_PROG_3X2TESTPOINTS  [2X3_TEST_POINTS]  179.83,68.33 0 bottom
J65  [JST-2-SMD]  12.19,126.3 0 top
J66  AVR_SPI_PROG_3X2TESTPOINTS  [2X3_TEST_POINTS]  12.19,109.47 0 bottom
J67  [JST-2-SMD]  23.37,126.3 0 top
J68  AVR_SPI_PROG_3X2TESTPOINTS  [2X3_TEST_POINTS]  23.37,109.47 0 bottom
J69  [JST-2-SMD]  34.54,126.3 0 top
J70  AVR_SPI_PROG_3X2TESTPOINTS  [2X3_TEST_POINTS]  34.54,109.47 0 bottom
J71  [JST-2-SMD]  45.72,126.3 0 top
J72  AVR_SPI_PROG_3X2TESTPOINTS  [2X3_TEST_POINTS]  45.72,109.47 0 bottom
J73  [JST-2-SMD]  56.9,126.3 0 top
J74  AVR_SPI_PROG_3X2TESTPOINTS  [2X3_TEST_POINTS]  56.9,109.47 0 bottom
J75  [JST-2-SMD]  68.07,126.3 0 top